# EAGLE board AllBoards1 (EAGLE 8.1.0), part 1 of 3
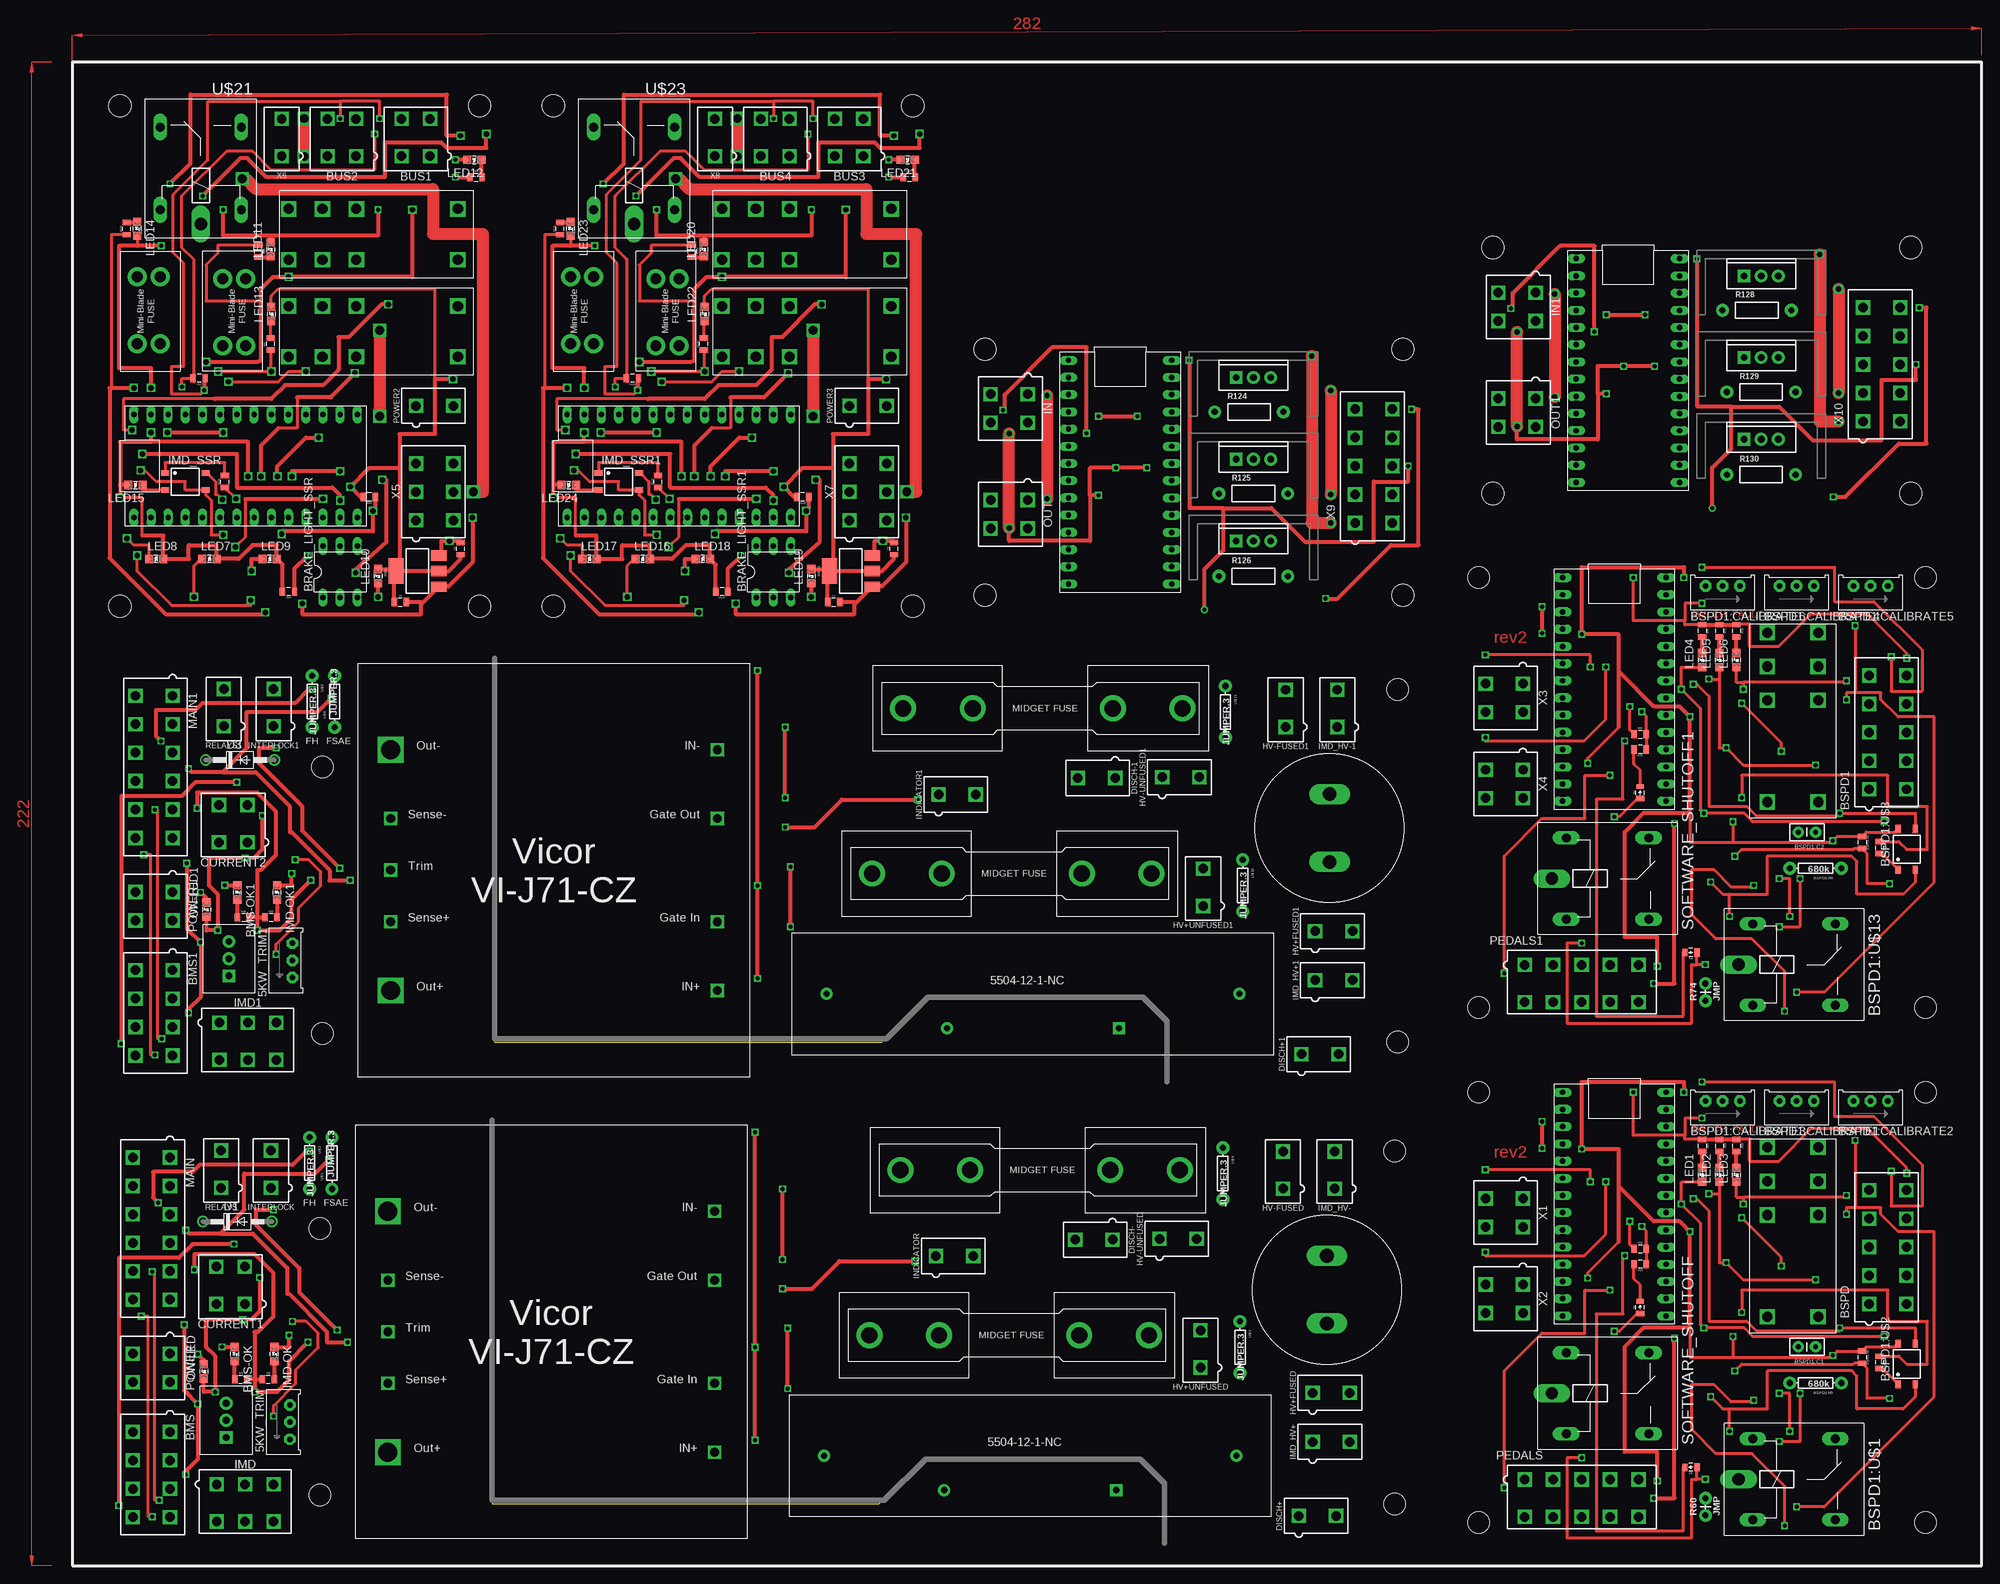
[diagram p0: board, top side]
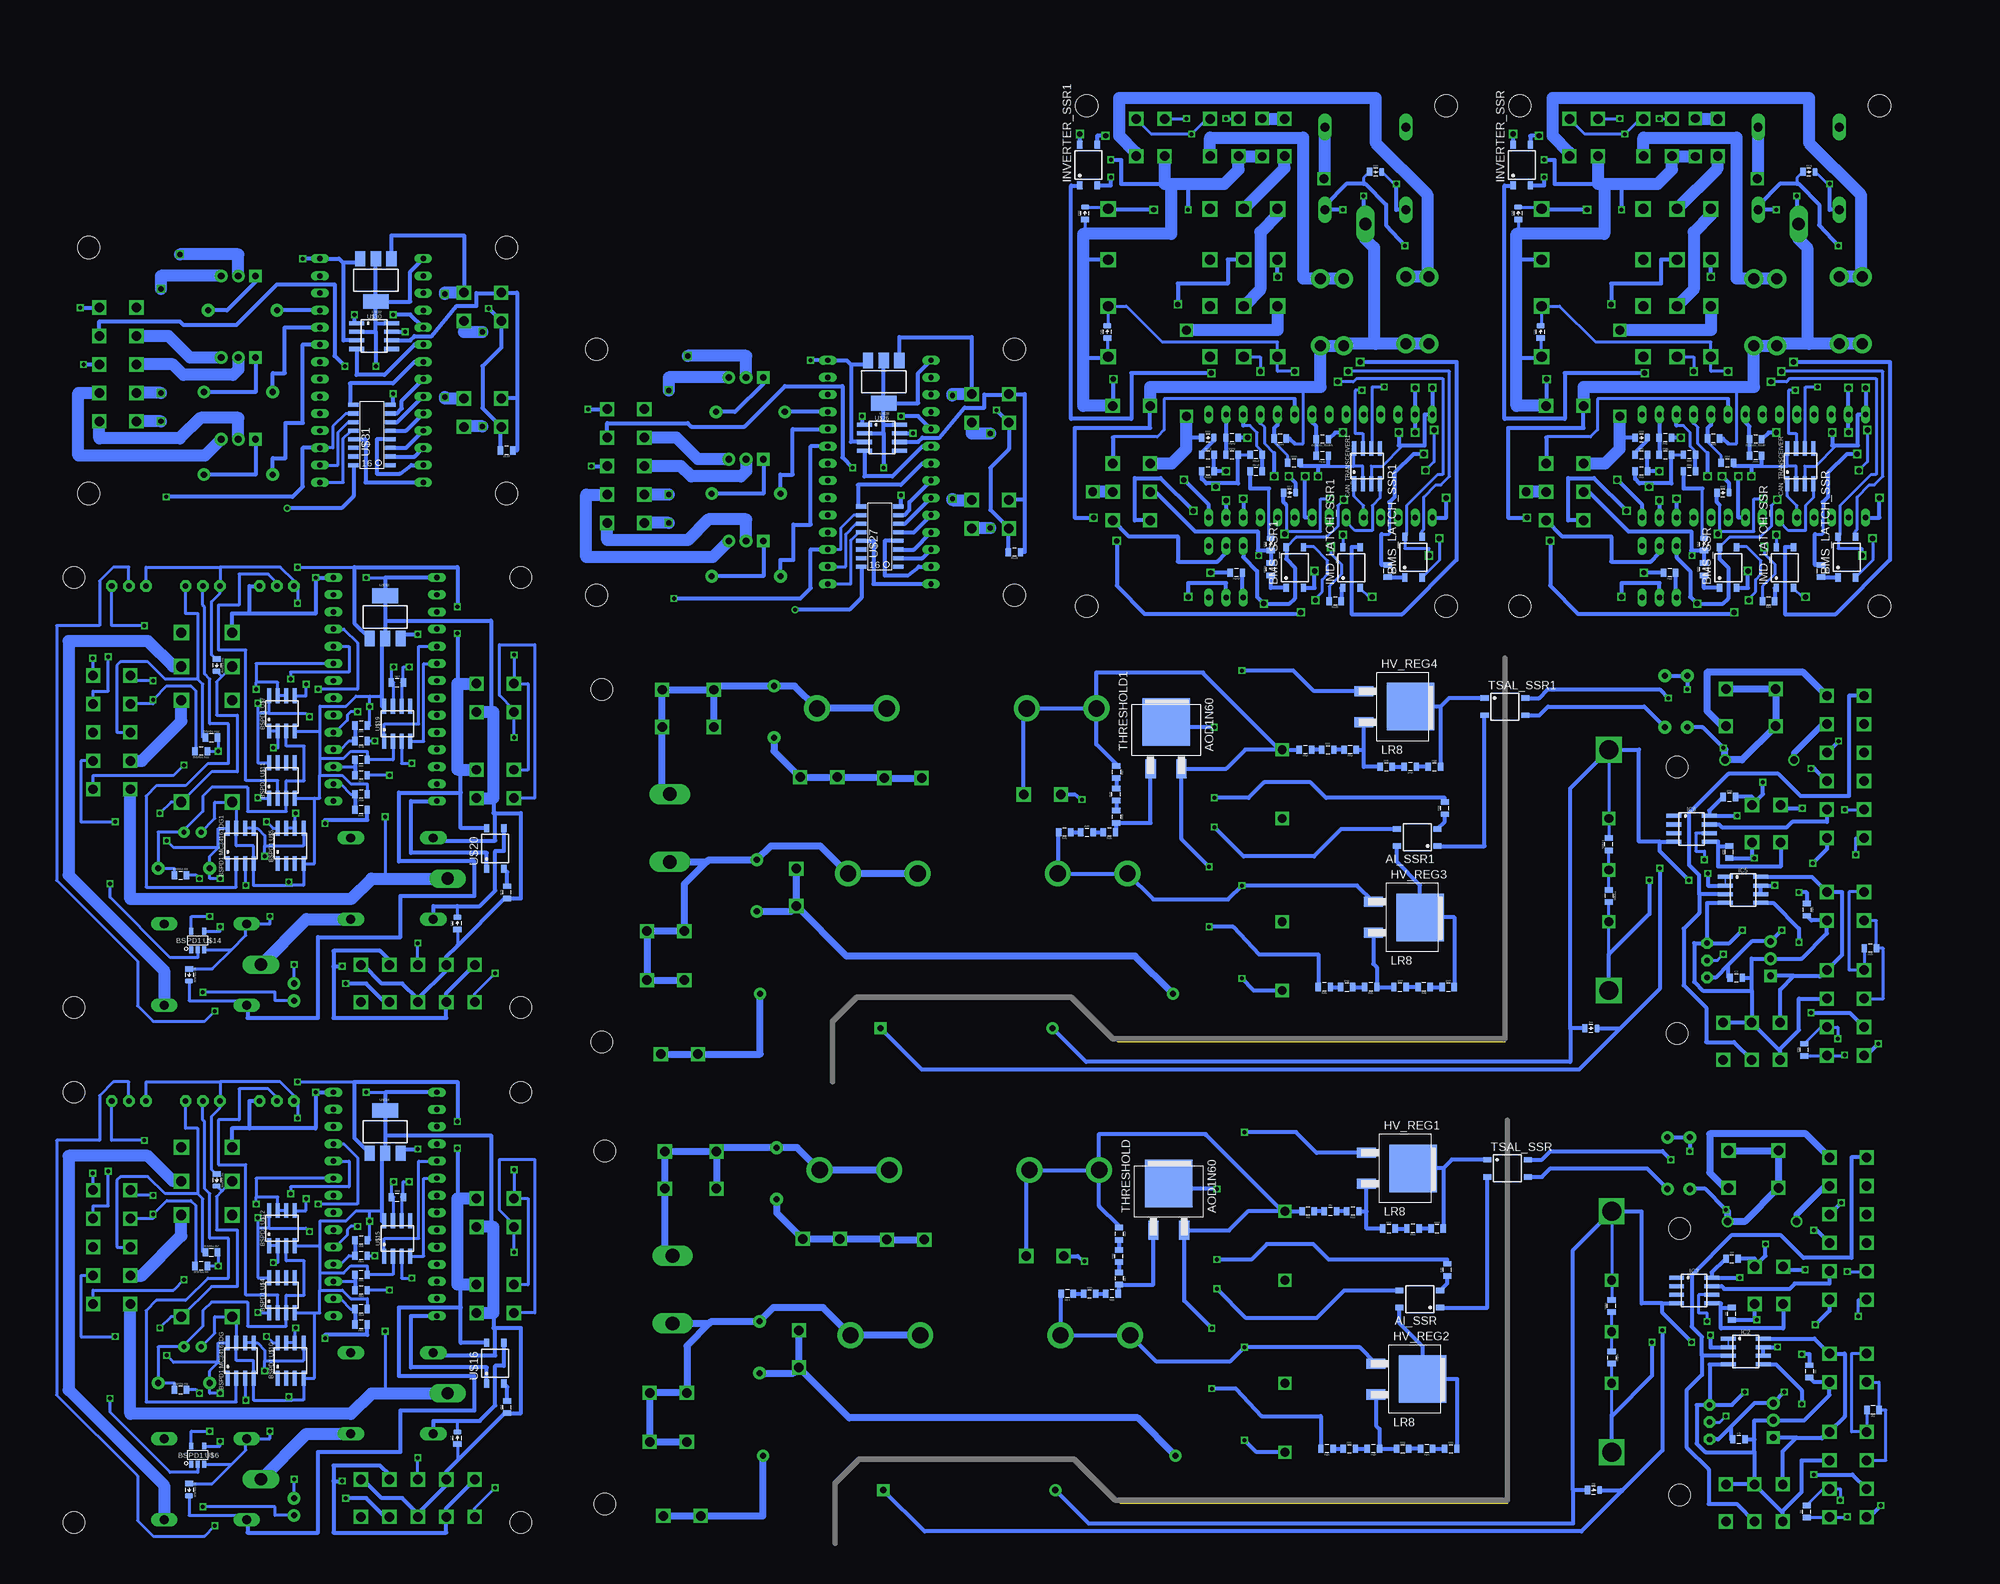
[diagram p1: board, bottom side, seen from below]

No outline drawn. Coordinates in mm, seen from the top.
Copper layers (1*16): Top 0.035mm / dielectric 1.5mm / Bottom 0.035mm
Design rules "default": minimum track width 10mil, minimum drill 24mil, track to track 8mil, track to pad 8mil, pad to pad 8mil, via to via 8mil, smd to smd 8mil, copper to edge 40mil, drill to drill 8mil, minimum pad ring 10mil, minimum via ring 8mil, stop-mask expansion 4mil, vias tented up to drill 0mil, thermal gap 10mil
Holes 3.2 mm at 36.58,49.78 36.58,10.41 195.33,9.14 195.33,61.21 36.97,117.95 36.97,78.58 195.72,77.31 195.72,129.38 207.68,69.91 273.72,69.91 273.72,6.41 207.68,6.41 207.68,145.91 273.72,145.91 273.72,82.41 207.68,82.41
Holes 3.3 mm at 7.05,215.58 60.13,215.58 7.05,141.67 60.13,141.67 71.05,215.58 124.13,215.58 71.05,141.67 124.13,141.67 196.53,179.64 134.81,179.64 196.53,143.32 134.81,143.32 271.53,194.64 209.81,194.64 271.53,158.32 209.81,158.32

## Footprints (pad centres in the part's own frame; a part is rotated, then mirrored left to right if it is on the bottom)
TRIMPOT_3296 = drill 0.813 pad 1.676 octagon: 1 2.54,1.27; 2 0,1.27; 3 -2.54,1.27
SOP04 = smd 0.8 x 1.2: 1 -1.27,-3; 2 1.27,-3; 3 1.27,3; 4 -1.27,3
MINIFIT_5566-8 = drill 1.4 square: 1 6.3,-2.75; 2 2.1,-2.75; 3 -2.1,-2.75; 4 -6.3,-2.75; 5 6.3,2.75; 6 2.1,2.75; 7 -2.1,2.75; 8 -6.3,2.75
LED-805 = smd 1.2 x 1.2: A 0,-1.05; C 0,1.05
0805 = smd 0.8 x 1.2: 1 -0.9,0; 2 0.9,0
DIL06 = drill 0.813 long: 1 -2.54,-3.81; 2 0,-3.81; 3 2.54,-3.81; 4 2.54,3.81; 5 0,3.81; 6 -2.54,3.81
MINIFIT_5566-10 = drill 1.4 square: 1 8.4,-2.75; 2 4.2,-2.75; 3 0,-2.75; 4 -4.2,-2.75; 5 -8.4,-2.75; 6 8.4,2.75; 7 4.2,2.75; 8 0,2.75; 9 -4.2,2.75; 10 -8.4,2.75
CAP-PTH-SMALLEZ = drill 0.7 pad 1.651: 1 0,0; 2 2.54,0
0805_D = smd 0.8 x 1.2: A -0.9,0; C 0.9,0
SOIC-08 = smd 0.6 x 2.2: 1 -1.905,-2.6; 2 -0.635,-2.6; 3 0.635,-2.6; 4 1.905,-2.6; 5 1.905,2.6; 6 0.635,2.6; 7 -0.635,2.6; 8 -1.905,2.6
AXIAL-0.3EZ = drill 0.9 pad 1.88: P$1 -3.81,0; P$2 3.81,0
ZF112 = drill 1.321 long: 1 4.064,14.884; 2 4.064,2.896; O 16.256,14.884; S 16.256,2.896 | drill 1.803 long: P 1.956,8.89
JW2SN = drill 1.5 square: 2 10.008,0; 3 5.004,0; 4 0,0; 5 0,7.493; 6 5.004,7.493; 7 10.008,7.493; COIL+ 25.019,0; COIL- 25.019,7.493
SOT-23-5 = smd 1 x 0.55: 1 -1.35,0.95; 2 -1.35,0; 3 -1.35,-0.95; 4 1.35,-0.95; 5 1.35,0.95
MINIFIT_5566-4 = drill 1.4 square: 1 2.1,-2.75; 2 -2.1,-2.75; 3 2.1,2.75; 4 -2.1,2.75
LLS2V221MELZ = drill 2 long: P$1 -5,0; P$2 5,0
DO-41 = drill 1.118: A 5.08,0; C -5.08,0
MINIFIT_5566-2 = drill 1.4 square: 1 0,-2.75; 2 0,2.75
1A3400_38.1MM = drill 2.413 pad 3.81: N3 30.988,0; N4 41.275,0; P1 0,0; P2 10.287,0
MINI-BLADE_FUSE_HOLDER = drill 1.613 pad 2.794: L1 0,3.404; L2 0,0; R1 9.906,3.404; R2 9.906,0
TO-252 = smd 1.499 x 2.794: 1 -2.286,0; 3 2.286,0 | smd 7.01 x 7.01: 2(TAB) 0,6.909
TO-220 = drill 1 pad 1.88 square: 1 -2.54,0 | drill 1 pad 1.88: 2 0,0; 3 2.54,0
MINIFIT_5566-6 = drill 1.4 square: 1 4.2,-2.75; 2 0,-2.75; 3 -4.2,-2.75; 4 4.2,2.75; 5 0,2.75; 6 -4.2,2.75
G2RL-2 = drill 1.5 square: 2 10.008,0; 3 5.004,0; 4 0,0; 5 0,7.493; 6 5.004,7.493; 7 10.008,7.493; COIL+ 25.019,0; COIL- 25.019,7.493
MINIFIT_5566-12 = drill 1.4 square: 1 10.5,-2.75; 2 6.3,-2.75; 3 2.1,-2.75; 4 -2.1,-2.75; 5 -6.3,-2.75; 6 -10.5,-2.75; 7 10.5,2.75; 8 6.3,2.75; 9 2.1,2.75; 10 -2.1,2.75; 11 -6.3,2.75; 12 -10.5,2.75
AXIAL-0.1 = drill 0.9 pad 1.88: P$1 0,0; P$2 2.54,0
AXIAL-0.4 = drill 0.9 pad 1.88: P$1 -5.08,0; P$2 5.08,0
SOT223 = smd 1.5 x 2.235: 1 -2.3,-3.15; 2 0,-3.15; 3 2.3,-3.15 | smd 3.8 x 2.2: 4 0,3.15
TO-220-SINK = drill 1 pad 1.88 square: 1 -2.54,0 | drill 1 pad 1.88: 2 0,0; 3 2.54,0
AXIAL-0.3 = drill 0.9 pad 1.88: P$1 -3.81,0; P$2 3.81,0
HV_DCDC_VI-J71-CZ = drill 1.3 square: 1VIN+ 5.08,-12.7; 2GATEIN 5.08,-22.86; 3GATEOUT 5.08,-38.1; 4VIN- 5.08,-48.26; 6SENSE+ 53.34,-22.86; 7TRIM 53.34,-30.48; 8SENSE- 53.34,-38.1 | drill 2.8 square: 5VOUT+ 53.34,-12.7; 9VOUT- 53.34,-48.26
5504-12-1-NC = drill 0.9 pad 1.778 square: COIL+ 48.26,-14.097 | drill 0.9 pad 1.778: COIL- 22.86,-14.097; CONTACT1 5.08,-9.017; CONTACT2 66.04,-9.017
TEENSY_3.2_SIMPLE = drill 0.8 long: 3.3V 16.51,29.21; A0 16.51,3.81; A1 16.51,6.35; A2 16.51,8.89; A3 16.51,11.43; A4 16.51,13.97; A5 16.51,16.51; A6 16.51,19.05; A7 16.51,21.59; A8 16.51,24.13; A9 16.51,26.67; AGND 16.51,31.75; D0(RX1) 1.27,31.75; D1(TX1) 1.27,29.21; D2 1.27,26.67; D3(CANTX) 1.27,24.13; D4(CANRX) 1.27,21.59; D5 1.27,19.05; D6 1.27,16.51; D7(RX3) 1.27,13.97; D8(TX3) 1.27,11.43; D9(RX2) 1.27,8.89; D10(TX2) 1.27,6.35; D11 1.27,3.81; D12 1.27,1.27; D13 16.51,1.27; GND 1.27,34.29; VIN 16.51,34.29
SOIC-16 = smd 0.61 x 1.524: 1 -4.445,-2.794; 2 -3.175,-2.794; 3 -1.905,-2.794; 4 -0.635,-2.794; 5 0.635,-2.794; 6 1.905,-2.794; 7 3.175,-2.794; 8 4.445,-2.794; 9 4.445,2.667; 10 3.175,2.667; 11 1.905,2.667; 12 0.635,2.667; 13 -0.635,2.667; 14 -1.905,2.667; 15 -3.175,2.667; 16 -4.445,2.667

## Placement (x,y rotation side)
5KW_TRIM  [TRIMPOT_3296]  30.86,21.21 270 top
5KW_TRIM1  [TRIMPOT_3296]  31.25,89.38 270 top
AI_SSR  CPC1002N  [SOP04]  74.93,39.37 90 bottom
AI_SSR1  CPC1002N  [SOP04]  75.32,107.54 90 bottom
BMS  [MINIFIT_5566-8]  11.68,13.46 90 top
BMS1  [MINIFIT_5566-8]  12.07,81.63 90 top
BMS-OK  [LED-805]  24,31.24 180 top
BMS-OK1  [LED-805]  24.39,99.41 180 top
BMS_LATCH_SSR  CPC1002N  [SOP04]  11.87,148.91 0 bottom
BMS_LATCH_SSR1  CPC1002N  [SOP04]  75.87,148.91 0 bottom
BMS_SSR  CPC1002N  [SOP04]  29.4,147.38 0 bottom
BMS_SSR1  CPC1002N  [SOP04]  93.4,147.38 0 bottom
BOARD_TEMP  THERMISTOR_NCP21  [0805]  25.34,166.31 180 bottom
BOARD_TEMP1  THERMISTOR_NCP21  [0805]  89.34,166.31 180 bottom
BRAKE_LIGHT_SSR  SOLID_STATE_RELAY_VO14642AT  [DIL06]  39.56,146.75 0 top
BRAKE_LIGHT_SSR1  SOLID_STATE_RELAY_VO14642AT  [DIL06]  103.56,146.75 0 top
BSPD  MINIFIT_5566-10  [MINIFIT_5566-10]  268.13,47.05 270 top
BSPD1  MINIFIT_5566-10  [MINIFIT_5566-10]  268.13,123.05 270 top
BSPD1:C1  .47u  [CAP-PTH-SMALLEZ]  257.46,32.32 180 top
BSPD1:C2  .47u  [CAP-PTH-SMALLEZ]  257.46,108.32 180 top
BSPD1:CALIBRATE1  [TRIMPOT_3296]  254.67,67.37 0 top
BSPD1:CALIBRATE2  [TRIMPOT_3296]  265.59,67.37 0 top
BSPD1:CALIBRATE3  [TRIMPOT_3296]  243.75,67.37 0 top
BSPD1:CALIBRATE4  [TRIMPOT_3296]  254.67,143.37 0 top
BSPD1:CALIBRATE5  [TRIMPOT_3296]  265.59,143.37 0 top
BSPD1:CALIBRATE6  [TRIMPOT_3296]  243.75,143.37 0 top
BSPD1:D1  DIODE0805  [0805_D]  252.64,56.96 270 bottom
BSPD1:D2  DIODE0805  [0805_D]  256.7,11.24 270 bottom
BSPD1:D3  DIODE0805  [0805_D]  252.64,132.96 270 bottom
BSPD1:D4  DIODE0805  [0805_D]  256.7,87.24 270 bottom
BSPD1:MC34161DG  [SOIC-08]  249.08,30.29 0 bottom
BSPD1:MC34161DG1  [SOIC-08]  249.08,106.29 0 bottom
BSPD1:R1  10k  [0805]  264.32,30.79 270 top
BSPD1:R2  10k  [0805]  264.32,106.79 270 top
BSPD1:R3  330  [0805]  257.97,25.97 0 bottom
BSPD1:R4  10k  [0805]  254.92,44.26 180 bottom
BSPD1:R5  680k  [AXIAL-0.3EZ]  257.46,26.98 180 top
BSPD1:R6  680  [0805]  266.86,30.03 270 top
BSPD1:R7  10k  [0805]  253.4,46.29 0 bottom
BSPD1:R8  330  [0805]  257.97,101.97 0 bottom
BSPD1:R9  680k  [AXIAL-0.3EZ]  257.46,102.98 180 top
BSPD1:R10  680  [0805]  266.86,106.03 270 top
BSPD1:R11  10k  [0805]  254.92,120.26 180 bottom
BSPD1:R12  10k  [0805]  253.4,122.29 0 bottom
BSPD1:U$1  G5LE  [ZF112]  244.13,3.87 0 top
BSPD1:U$2  CPC1002N  [SOP04]  270.92,29.78 0 top
BSPD1:U$3  JW2SN-DC5V  [JW2SN]  250.35,61.78 270 top
BSPD1:U$4  MCP6002SOIC  [SOIC-08]  242.98,39.94 0 bottom
BSPD1:U$5  MCP6002SOIC  [SOIC-08]  241.71,106.29 0 bottom
BSPD1:U$6  SN74LVC1G07  [SOT-23-5]  255.43,16.32 90 bottom
BSPD1:U$7  MCP6002SOIC  [SOIC-08]  242.98,125.84 0 bottom
BSPD1:U$8  CPC1002N  [SOP04]  270.92,105.78 0 top
BSPD1:U$9  JW2SN-DC5V  [JW2SN]  250.35,137.78 270 top
BSPD1:U$10  MCP6002SOIC  [SOIC-08]  241.71,30.29 0 bottom
BSPD1:U$11  MCP6002SOIC  [SOIC-08]  242.98,115.94 0 bottom
BSPD1:U$12  MCP6002SOIC  [SOIC-08]  242.98,49.84 0 bottom
BSPD1:U$13  G5LE  [ZF112]  244.13,79.87 0 top
BSPD1:U$14  SN74LVC1G07  [SOT-23-5]  255.43,92.32 90 bottom
BUS1  MINIFIT_5566-4  [MINIFIT_5566-4]  50.74,210.88 0 top
BUS2  MINIFIT_5566-4  [MINIFIT_5566-4]  39.81,210.88 0 top
BUS3  MINIFIT_5566-4  [MINIFIT_5566-4]  114.74,210.88 0 top
BUS4  MINIFIT_5566-4  [MINIFIT_5566-4]  103.81,210.88 0 top
C1  220uF  [LLS2V221MELZ]  185.29,40.77 90 top
C2  1uF  [0805]  28.2,86.84 0 bottom
C3  1uF  [0805]  27.81,18.67 0 bottom
C4  220uF  [LLS2V221MELZ]  185.68,108.94 90 top
C5  .22uF  [0805]  48.45,142.3 0 top
C6  .1uF  [0805]  57.34,150.18 90 top
C7  .22uF  [0805]  112.45,142.3 0 top
C8  .1uF  [0805]  121.34,150.18 90 top
CAN_TRANSCEIVER  MCP2551  [SOIC-08]  18.73,162.37 0 bottom
CAN_TRANSCEIVER1  MCP2551  [SOIC-08]  82.73,162.37 0 bottom
CURRENT1  [MINIFIT_5566-4]  23.37,41.4 0 top
CURRENT2  [MINIFIT_5566-4]  23.76,109.57 0 top
D1  DIODE  [DO-41]  24.38,50.8 0 top
D2  DIODE0805  [0805_D]  49.28,11.18 0 bottom
D3  DIODE  [DO-41]  24.77,118.97 0 top
D4  DIODE0805  [0805_D]  49.67,79.35 0 bottom
D5  DIODE0805  [0805_D]  239.05,14.54 180 top
D6  DIODE0805  [0805_D]  231.55,38.16 90 top
D7  DIODE0805  [0805_D]  217.08,18.86 90 bottom
D8  DIODE0805  [0805_D]  239.05,90.54 180 top
D9  DIODE0805  [0805_D]  231.55,114.16 90 top
D10  DIODE0805  [0805_D]  217.08,94.86 90 bottom
D11  DIODE0805  [0805_D]  30.16,158.43 0 bottom
D12  DIODE0805  [0805_D]  32.96,150.81 90 bottom
D13  DIODE0805  [0805_D]  42.23,166.56 0 bottom
D14  DIODE0805  [0805_D]  17.46,205.8 0 bottom
D15  DIODE0805  [0805_D]  57.09,182.18 90 bottom
D16  DIODE0805  [0805_D]  60.39,199.71 90 bottom
D17  DIODE0805  [0805_D]  94.16,158.43 0 bottom
D18  DIODE0805  [0805_D]  96.96,150.81 90 bottom
D19  DIODE0805  [0805_D]  106.23,166.56 0 bottom
D20  DIODE0805  [0805_D]  81.46,205.8 0 bottom
D21  DIODE0805  [0805_D]  121.09,182.18 90 bottom
D22  DIODE0805  [0805_D]  124.39,199.71 90 bottom
DISCH+  TO DISCHARGE +  [MINIFIT_5566-2]  183.9,7.37 270 top
DISCH+1  TO DISCHARGE +  [MINIFIT_5566-2]  184.29,75.54 270 top
DISCH-  TO DISCHARGE -  [MINIFIT_5566-2]  150.88,48.13 90 top
DISCH-1  TO DISCHARGE -  [MINIFIT_5566-2]  151.27,116.3 90 top
FUSE  250mA  [1A3400_38.1MM]  159,34.04 180 top
FUSE1  250mA  [1A3400_38.1MM]  163.58,58.42 180 top
FUSE2  250mA  [1A3400_38.1MM]  159.39,102.21 180 top
FUSE3  250mA  [1A3400_38.1MM]  163.97,126.59 180 top
FUSE_BUS_1  5A  [MINI-BLADE_FUSE_HOLDER]  9.59,190.31 270 top
FUSE_BUS_2  5A  [MINI-BLADE_FUSE_HOLDER]  25.59,180.15 90 top
FUSE_BUS_3  5A  [MINI-BLADE_FUSE_HOLDER]  73.59,190.31 270 top
FUSE_BUS_4  5A  [MINI-BLADE_FUSE_HOLDER]  89.59,180.15 90 top
HV+FUSED  [MINIFIT_5566-2]  185.93,25.53 270 top
HV+FUSED1  [MINIFIT_5566-2]  186.32,93.7 270 top
HV+UNFUSED  CONNECTOR FSAE  [MINIFIT_5566-2]  166.62,32 0 top
HV+UNFUSED1  CONNECTOR FSAE  [MINIFIT_5566-2]  167.01,100.17 0 top
HV-FUSED  [MINIFIT_5566-2]  178.82,58.42 0 top
HV-FUSED1  [MINIFIT_5566-2]  179.21,126.59 0 top
HV-UNFUSED  CONNECTOR FSAE  [MINIFIT_5566-2]  163.32,48.26 270 top
HV-UNFUSED1  CONNECTOR FSAE  [MINIFIT_5566-2]  163.71,116.43 270 top
HV_REG1  LR8  [TO-252]  82.8,58.67 270 bottom
HV_REG2  LR8  [TO-252]  81.41,27.56 270 bottom
HV_REG3  LR8  [TO-252]  81.8,95.73 270 bottom
HV_REG4  LR8  [TO-252]  83.19,126.84 270 bottom
IC1  [TO-220]  22.73,21.46 90 top
IC2  MCP6002SOIC  [SOIC-08]  26.8,31.62 270 bottom
IC3  MCP6002SOIC  [SOIC-08]  34.42,40.64 270 bottom
IC4  [TO-220]  23.12,89.63 90 top
IC5  MCP6002SOIC  [SOIC-08]  27.19,99.79 270 bottom
IC6  MCP6002SOIC  [SOIC-08]  34.81,108.81 270 bottom
IMD  [MINIFIT_5566-6]  25.53,9.27 180 top
IMD1  [MINIFIT_5566-6]  25.92,77.44 180 top
IMD-OK  [LED-805]  29.84,31.24 180 top
IMD-OK1  [LED-805]  30.23,99.41 180 top
IMD_HV+  [MINIFIT_5566-2]  185.93,18.29 270 top
IMD_HV+1  [MINIFIT_5566-2]  186.32,86.46 270 top
IMD_HV-  [MINIFIT_5566-2]  186.44,58.42 0 top
IMD_HV-1  [MINIFIT_5566-2]  186.83,126.59 0 top
IMD_LATCH_SSR  CPC1002N  [SOP04]  21.02,147.38 0 bottom
IMD_LATCH_SSR1  CPC1002N  [SOP04]  85.02,147.38 0 bottom
IMD_SHUTDOWN  G2RL-2-DC12  [G2RL-2]  31.94,192.85 0 top
IMD_SHUTDOWN1  G2RL-2-DC12  [G2RL-2]  31.94,178.5 0 top
IMD_SHUTDOWN2  G2RL-2-DC12  [G2RL-2]  95.94,192.85 0 top
IMD_SHUTDOWN3  G2RL-2-DC12  [G2RL-2]  95.94,178.5 0 top
IMD_SSR  CPC1002N  [SOP04]  16.7,160.08 270 top
IMD_SSR1  CPC1002N  [SOP04]  80.7,160.08 270 top
IN  MINIFIT_5566-4  [MINIFIT_5566-4]  138.37,170.88 90 top
IN1  MINIFIT_5566-4  [MINIFIT_5566-4]  213.37,185.88 90 top
INDICATOR  [MINIFIT_5566-2]  130.3,45.72 270 top
INDICATOR1  [MINIFIT_5566-2]  130.69,113.89 270 top
INTERLOCK  [MINIFIT_5566-2]  29.34,58.55 0 top
INTERLOCK1  [MINIFIT_5566-2]  29.73,126.72 0 top
INVERTER_SSR  CPC1002N  [SOP04]  59.88,206.82 0 bottom
INVERTER_SSR1  CPC1002N  [SOP04]  123.88,206.82 0 bottom
LED1  [LED-805]  240.7,57.72 0 top
LED2  [LED-805]  243.24,57.72 0 top
LED3  [LED-805]  245.78,57.72 0 top
LED4  [LED-805]  240.7,133.72 0 top
LED5  [LED-805]  243.24,133.72 0 top
LED6  [LED-805]  245.78,133.72 0 top
LED7  [LED-805]  20.26,148.65 270 top
LED8  [LED-805]  12.38,148.65 270 top
LED9  [LED-805]  29.15,148.65 270 top
LED10  [LED-805]  45.15,146.11 0 top
LED11  [LED-805]  29.27,194.37 0 top
LED12  [LED-805]  59.37,207.58 90 top
LED13  [LED-805]  29.4,184.85 0 top
LED14  [LED-805]  9.59,197.42 180 top
LED15  [LED-805]  9.33,159.57 90 top
LED16  [LED-805]  84.26,148.65 270 top
LED17  [LED-805]  76.38,148.65 270 top
LED18  [LED-805]  93.15,148.65 270 top
LED19  [LED-805]  109.15,146.11 0 top
LED20  [LED-805]  93.27,194.37 0 top
LED21  [LED-805]  123.37,207.58 90 top
LED22  [LED-805]  93.4,184.85 0 top
LED23  [LED-805]  73.59,197.42 180 top
LED24  [LED-805]  73.33,159.57 90 top
MAIN  [MINIFIT_5566-12]  11.68,49.78 90 top
MAIN1  [MINIFIT_5566-12]  12.07,117.95 90 top
ON-LED  [LED-805]  19.43,28.7 0 top
ON-LED1  [LED-805]  19.82,96.87 0 top
OUT  MINIFIT_5566-4  [MINIFIT_5566-4]  138.37,155.26 90 top
OUT1  MINIFIT_5566-4  [MINIFIT_5566-4]  213.37,170.26 90 top
PEDALS  MINIFIT_5566-10  [MINIFIT_5566-10]  222.92,9.97 180 top
PEDALS1  MINIFIT_5566-10  [MINIFIT_5566-10]  222.92,85.97 180 top
POWER  [MINIFIT_5566-4]  11.68,29.21 90 top
POWER1  [MINIFIT_5566-4]  12.07,97.38 90 top
POWER2  MINIFIT_5566-2  [MINIFIT_5566-2]  53.53,171.26 270 top
POWER3  MINIFIT_5566-2  [MINIFIT_5566-2]  117.53,171.26 270 top
R1  120  [0805]  17.78,8 90 bottom
R2  120  [0805]  8,22.99 180 bottom
R3  [0805]  28.96,27.56 0 top
R4  [0805]  24.89,27.56 0 top
R5  100  [0805]  17.4,28.7 270 bottom
R6  10k  [0805]  28.83,37.21 90 bottom
R7  10k  [0805]  28.83,45.34 0 bottom
R8  8.2k  [0805]  91.44,52.32 180 bottom
R9  8.2k  [0805]  88.14,52.32 0 bottom
R10  8.2k  [0805]  84.84,52.32 180 bottom
R11  2k  [0805]  79.5,49.78 0 bottom
R12  2k  [0805]  75.95,49.78 180 bottom
R13  2k  [0805]  72.39,49.78 0 bottom
R14  500k  [0805]  127,40.13 180 bottom
R15  500k  [0805]  123.7,40.13 0 bottom
R16  500k  [0805]  120.4,40.13 180 bottom
R17  40k  [0805]  119.38,42.42 270 bottom
R18  40k  [0805]  119.38,45.72 90 bottom
R19  40k  [0805]  119.38,49.02 270 bottom
R20  20k  [0805]  88.65,17.27 180 bottom
R21  20k  [0805]  85.34,17.27 0 bottom
R22  20k  [0805]  81.79,17.27 180 bottom
R23  2k  [0805]  77.47,17.27 0 bottom
R24  2k  [0805]  73.91,17.27 180 bottom
R25  2k  [0805]  70.36,17.27 0 bottom
R26  1k  [0805]  70.87,43.69 90 bottom
R27  2k  [0805]  77.86,85.44 0 bottom
R28  10k  [0805]  29.22,113.51 0 bottom
R29  [0805]  29.35,95.73 0 top
R30  [0805]  25.28,95.73 0 top
R31  20k  [0805]  82.18,85.44 180 bottom
R32  10k  [0805]  29.22,105.38 90 bottom
R33  120  [0805]  18.17,76.17 90 bottom
R34  100  [0805]  17.79,96.87 270 bottom
R35  120  [0805]  8.39,91.16 180 bottom
R36  500k  [0805]  120.79,108.3 180 bottom
R37  40k  [0805]  119.77,117.19 270 bottom
R38  1k  [0805]  71.26,111.86 90 bottom
R39  2k  [0805]  72.78,117.95 0 bottom
R40  500k  [0805]  124.09,108.3 0 bottom
R41  500k  [0805]  127.39,108.3 180 bottom
R42  40k  [0805]  119.77,113.89 90 bottom
R43  40k  [0805]  119.77,110.59 270 bottom
R44  2k  [0805]  76.34,117.95 180 bottom
R45  2k  [0805]  79.89,117.95 0 bottom
R46  2k  [0805]  74.3,85.44 180 bottom
R47  2k  [0805]  70.75,85.44 0 bottom
R48  20k  [0805]  85.73,85.44 0 bottom
R49  20k  [0805]  89.04,85.44 180 bottom
R50  8.2k  [0805]  85.23,120.49 180 bottom
R51  8.2k  [0805]  88.53,120.49 0 bottom
R52  8.2k  [0805]  91.83,120.49 180 bottom
R53  120  [0805]  225.97,54.42 0 bottom
R54  15k  [0805]  231.3,37.91 180 bottom
R55  15k  [0805]  231.3,42.99 180 bottom
R56  15k  [0805]  231.3,48.07 180 bottom
R57  150  [0805]  240.7,62.04 270 top
R58  150  [0805]  243.24,62.04 270 top
R59  150  [0805]  245.78,62.04 270 top
R60  JMP  [AXIAL-0.1]  241.21,7.43 90 top
R61  100  [0805]  209.71,23.43 90 bottom
R62  10k  [0805]  231.3,35.62 180 bottom
R63  10k  [0805]  231.3,40.7 180 bottom
R64  10k  [0805]  231.3,45.78 180 bottom
R65  43k  [0805]  231.55,44.51 180 top
R66  12k  [0805]  231.55,46.8 0 top
R67  120  [0805]  225.97,130.42 0 bottom
R68  15k  [0805]  231.3,113.91 180 bottom
R69  15k  [0805]  231.3,118.99 180 bottom
R70  15k  [0805]  231.3,124.07 180 bottom
R71  150  [0805]  240.7,138.04 270 top
R72  150  [0805]  243.24,138.04 270 top
R73  150  [0805]  245.78,138.04 270 top
R74  JMP  [AXIAL-0.1]  241.21,83.43 90 top
R75  100  [0805]  209.71,99.43 90 bottom
R76  10k  [0805]  231.3,111.62 180 bottom
R77  10k  [0805]  231.3,116.7 180 bottom
R78  10k  [0805]  231.3,121.78 180 bottom
R79  43k  [0805]  231.55,120.51 180 top
R80  12k  [0805]  231.55,122.8 0 top
R81  43k  [0805]  38.67,166.56 180 bottom
R82  100  [0805]  38.04,146.62 180 bottom
R83  100  [0805]  32.96,147.13 90 bottom
R84  100  [0805]  23.43,142.43 180 bottom
R85  100  [0805]  15.68,146.87 270 bottom
R86  820  [0805]  27.5,194.12 270 top
R87  120  [0805]  18.73,175.32 180 top
R88  12k  [0805]  38.67,164.02 0 bottom
R89  43k  [0805]  35.12,161.61 0 bottom
R90  12k  [0805]  35.12,164.02 180 bottom
R91  43k  [0805]  42.23,164.02 0 bottom
R92  12k  [0805]  42.23,161.61 180 bottom
R93  43k  [0805]  31.56,166.43 180 bottom
R94  12k  [0805]  29.53,162.88 0 bottom
R95  10k  [0805]  25.34,163.89 180 bottom
R96  100  [0805]  59.63,205.04 0 top
R97  820  [0805]  29.27,180.4 90 top
R98  10k  [0805]  31.94,143.83 180 top
R99  2.2k  [0805]  43.88,157.8 180 top
R100  270  [0805]  8.06,197.42 90 top
R101  680  [0805]  22.54,160.08 90 top
R102  43k  [0805]  102.67,166.56 180 bottom
R103  100  [0805]  102.04,146.62 180 bottom
R104  100  [0805]  96.96,147.13 90 bottom
R105  100  [0805]  87.43,142.43 180 bottom
R106  100  [0805]  79.68,146.87 270 bottom
R107  820  [0805]  91.5,194.12 270 top
R108  120  [0805]  82.73,175.32 180 top
R109  12k  [0805]  102.67,164.02 0 bottom
R110  43k  [0805]  99.11,161.61 0 bottom
R111  12k  [0805]  99.11,164.02 180 bottom
R112  43k  [0805]  106.23,164.02 0 bottom
R113  12k  [0805]  106.23,161.61 180 bottom
R114  43k  [0805]  95.56,166.43 180 bottom
R115  12k  [0805]  93.53,162.88 0 bottom
R116  10k  [0805]  89.34,163.89 180 bottom
R117  100  [0805]  123.63,205.04 0 top
R118  820  [0805]  93.27,180.4 90 top
R119  10k  [0805]  95.94,143.83 180 top
R120  2.2k  [0805]  107.88,157.8 180 top
R121  270  [0805]  72.06,197.42 90 top
R122  680  [0805]  86.54,160.08 90 top
R123  120  [0805]  134.81,149.67 180 bottom
R124  [AXIAL-0.4]  173.8,170.37 0 top
R125  [AXIAL-0.4]  174.43,158.3 0 top
R126  [AXIAL-0.4]  174.43,146.11 0 top
R127  120  [0805]  209.81,164.67 180 bottom
R128  [AXIAL-0.4]  248.8,185.37 0 top
R129  [AXIAL-0.4]  249.43,173.3 0 top
R130  [AXIAL-0.4]  249.43,161.11 0 top
REG  5V  [SOT223]  50.99,146.87 90 top
REG1  5V  [SOT223]  114.99,146.87 90 top
RELAYS  [MINIFIT_5566-2]  21.97,58.55 0 top
RELAYS1  [MINIFIT_5566-2]  22.36,126.72 0 top
SOFTWARE_SHUTOFF  G5LE  [ZF112]  216.57,16.57 0 top
SOFTWARE_SHUTOFF1  G5LE  [ZF112]  216.57,92.57 0 top
T1  N-CHANNEL_MOSFETGENERIC  [TO-220-SINK]  174.43,175.45 0 top
T2  N-CHANNEL_MOSFETGENERIC  [TO-220-SINK]  174.43,163.38 0 top
T3  N-CHANNEL_MOSFETGENERIC  [TO-220-SINK]  174.43,151.32 0 top
T4  N-CHANNEL_MOSFETGENERIC  [TO-220-SINK]  249.43,190.45 0 top
T5  N-CHANNEL_MOSFETGENERIC  [TO-220-SINK]  249.43,178.38 0 top
T6  N-CHANNEL_MOSFETGENERIC  [TO-220-SINK]  249.43,166.32 0 top
THRESHOLD  AOD1N60  [TO-252]  112.01,49.53 0 bottom
THRESHOLD1  AOD1N60  [TO-252]  112.4,117.7 0 bottom
TRIM+  [0805]  46.61,30.73 270 bottom
TRIM+1  [0805]  47,98.9 270 bottom
TRIM-  [0805]  46.61,38.35 90 bottom
TRIM-1  [0805]  47,106.52 90 bottom
TSAL_SSR  CPC1002N  [SOP04]  61.98,58.67 270 bottom
TSAL_SSR1  CPC1002N  [SOP04]  62.37,126.84 270 bottom
U$1  JUMPER.3  [AXIAL-0.3]  38.35,59.44 90 top
U$2  JUMPER.3  [AXIAL-0.3]  35.05,59.44 270 top
U$3  JUMPER.3  [AXIAL-0.3]  172.47,32.26 270 top
U$4  JUMPER.3  [AXIAL-0.3]  169.93,57.91 270 top
U$5  HV_DCDC_VI-J71-CZ  [HV_DCDC_VI-J71-CZ]  99.95,4.06 180 top
U$6  5504-12-1-NC  [5504-12-1-NC]  106.31,93.44 0 top
U$7  HV_DCDC_VI-J71-CZ  [HV_DCDC_VI-J71-CZ]  100.34,72.23 180 top
U$8  JUMPER.3  [AXIAL-0.3]  38.74,127.61 90 top
U$9  JUMPER.3  [AXIAL-0.3]  35.44,127.61 270 top
U$10  JUMPER.3  [AXIAL-0.3]  172.86,100.43 270 top
U$11  JUMPER.3  [AXIAL-0.3]  170.32,126.08 270 top
U$12  5504-12-1-NC  [5504-12-1-NC]  105.92,25.27 0 top
U$13  TEENSY_3.2_SIMPLE  [TEENSY_3.2_SIMPLE]  218.85,35.62 0 top
U$14  [SOT223]  227.74,64.07 0 bottom
U$15  MCP2551  [SOIC-08]  225.97,48.32 0 bottom
U$16  CPC1002N  [SOP04]  211.49,29.91 0 bottom
U$17  TEENSY_3.2_SIMPLE  [TEENSY_3.2_SIMPLE]  218.85,111.62 0 top
U$18  [SOT223]  227.74,140.07 0 bottom
U$19  MCP2551  [SOIC-08]  225.97,124.32 0 bottom
U$20  CPC1002N  [SOP04]  211.49,105.91 0 bottom
U$21  G5LE  [ZF112]  27.88,196.15 90 top
U$22  TEENSY_3.2_SIMPLE  [TEENSY_3.2_SIMPLE]  43.37,153.48 90 top
U$23  G5LE  [ZF112]  91.88,196.15 90 top
U$24  TEENSY_3.2_SIMPLE  [TEENSY_3.2_SIMPLE]  107.37,153.48 90 top
U$25  TEENSY_3.2_SIMPLE  [TEENSY_3.2_SIMPLE]  145.86,143.7 0 top
U$26  MCP2551  [SOIC-08]  154.37,166.56 270 bottom
U$27  CD4040BSOIC  [SOIC-16]  154.75,151.95 90 bottom
U$28  [SOT223]  154.11,174.81 180 bottom
U$29  TEENSY_3.2_SIMPLE  [TEENSY_3.2_SIMPLE]  220.86,158.7 0 top
U$30  MCP2551  [SOIC-08]  229.37,181.56 270 bottom
U$31  CD4040BSOIC  [SOIC-16]  229.75,166.95 90 bottom
U$32  [SOT223]  229.11,189.81 180 bottom
X1  MINIFIT_5566-4  [MINIFIT_5566-4]  211.49,52.13 90 top
X2  MINIFIT_5566-4  [MINIFIT_5566-4]  211.49,39.43 90 top
X3  MINIFIT_5566-4  [MINIFIT_5566-4]  211.49,128.13 90 top
X4  MINIFIT_5566-4  [MINIFIT_5566-4]  211.49,115.43 90 top
X5  MINIFIT_5566-6  [MINIFIT_5566-6]  53.53,158.56 270 top
X6  MINIFIT_5566-2  [MINIFIT_5566-2]  30.92,210.88 0 top
X7  MINIFIT_5566-6  [MINIFIT_5566-6]  117.53,158.56 270 top
X8  MINIFIT_5566-2  [MINIFIT_5566-2]  94.92,210.88 0 top
X9  CONNECTOR-10  [MINIFIT_5566-10]  192.21,162.37 270 top
X10  CONNECTOR-10  [MINIFIT_5566-10]  267.21,177.37 270 top

## Library data of the parts
5KW_TRIM 5KW_TRIM1 AI_SSR AI_SSR1 BMS-OK BMS-OK1 BMS_LATCH_SSR BMS_LATCH_SSR1 BMS_SSR BMS_SSR1 BOARD_TEMP BOARD_TEMP1 BRAKE_LIGHT_SSR BRAKE_LIGHT_SSR1 BSPD1:C1 BSPD1:C2 BSPD1:CALIBRATE1-BSPD1:CALIBRATE6 BSPD1:D1-BSPD1:D4 BSPD1:MC34161DG BSPD1:MC34161DG1 BSPD1:R1-BSPD1:R12 BSPD1:U$1-BSPD1:U$14 C1-C8 CAN_TRANSCEIVER CAN_TRANSCEIVER1 D1-D22 FUSE FUSE1-FUSE3 FUSE_BUS_1-FUSE_BUS_4 HV_REG1-HV_REG4 IC1-IC6 IMD-OK IMD-OK1 IMD_LATCH_SSR IMD_LATCH_SSR1 IMD_SHUTDOWN IMD_SHUTDOWN1-IMD_SHUTDOWN3 IMD_SSR IMD_SSR1 INVERTER_SSR INVERTER_SSR1 LED1-LED24 ON-LED ON-LED1 R1-R130 REG REG1 SOFTWARE_SHUTOFF SOFTWARE_SHUTOFF1 THRESHOLD THRESHOLD1 TRIM+ TRIM+1 TRIM- TRIM-1 TSAL_SSR TSAL_SSR1 U$1-U$32 = HyTechDevices
BMS BMS1 BSPD BSPD1 BUS1-BUS4 CURRENT1 CURRENT2 IN IN1 MAIN MAIN1 OUT OUT1 PEDALS PEDALS1 POWER POWER1 X1-X4 X9 X10 = HyTechDevices; OC_FARNELL: unknown; OC_NEWARK: unknown
DISCH+ DISCH+1 DISCH- DISCH-1 HV+FUSED HV+FUSED1 HV+UNFUSED HV+UNFUSED1 HV-FUSED HV-FUSED1 HV-UNFUSED HV-UNFUSED1 IMD_HV+ IMD_HV+1 IMD_HV- IMD_HV-1 INDICATOR INDICATOR1 INTERLOCK INTERLOCK1 POWER2 POWER3 RELAYS RELAYS1 X6 X8 = HyTechDevices; OC_FARNELL: 1822072; OC_NEWARK: unknown
IMD IMD1 X5 X7 = HyTechDevices; MPN: 95566-61002; OC_FARNELL: unknown; OC_NEWARK: 22K8620
T1-T6 = HyTechDevices; _EXTERNAL_: 1

## Nets
5KW_TRIG: 5KW_TRIM.2 IC3.6
5KW_TRIG1: 5KW_TRIM1.2 IC6.6
12V_F1: BUS1.1 FUSE_BUS_1.L1 FUSE_BUS_1.L2
12V_F2: BUS2.1 FUSE_BUS_2.R1 FUSE_BUS_2.R2
12V_F3: BUS3.1 FUSE_BUS_3.L1 FUSE_BUS_3.L2
12V_F4: BUS4.1 FUSE_BUS_4.R1 FUSE_BUS_4.R2
12VSUPPLY_READ: R93.2 R94.1 U$22.A3
12VSUPPLY_READ1: R114.2 R115.1 U$24.A3
+5V: 5KW_TRIM.1 C3.1 CURRENT1.1 IC1.3 IC3.8 ON-LED.A R6.1 R7.1
+5V1: 5KW_TRIM1.1 C2.1 CURRENT2.1 IC4.3 IC6.8 ON-LED1.A R28.1 R32.1
+5V2: BSPD1:CALIBRATE3.1 BSPD1:MC34161DG.8 BSPD1:R1.1 BSPD1:R4.1 BSPD1:R5.P$2 BSPD1:R7.2 BSPD1:U$2.4 BSPD1:U$3.4 BSPD1:U$4.8 BSPD1:U$6.5 BSPD1:U$10.8 BSPD1:U$12.8 PEDALS.1 PEDALS.4 PEDALS.7 U$13.VIN U$14.3 U$15.3
+5V3: BSPD1:CALIBRATE6.1 BSPD1:MC34161DG1.8 BSPD1:R2.1 BSPD1:R9.P$2 BSPD1:R11.1 BSPD1:R12.2 BSPD1:U$5.8 BSPD1:U$7.8 BSPD1:U$8.4 BSPD1:U$9.4 BSPD1:U$11.8 BSPD1:U$14.5 PEDALS1.1 PEDALS1.4 PEDALS1.7 U$17.VIN U$18.3 U$19.3
+5V4: BOARD_TEMP.1 C6.2 CAN_TRANSCEIVER.3 R100.1 REG.3 U$22.VIN
+5V5: BOARD_TEMP1.1 C8.2 CAN_TRANSCEIVER1.3 R121.1 REG1.3 U$24.VIN
+5V6: U$25.VIN U$26.3 U$27.16 U$28.3 X9.8
+5V7: U$29.VIN U$30.3 U$31.16 U$32.3 X10.8
+12V: BMS.1 IC1.1 IC2.8 IMD.1 POWER.1
+12V1: BMS1.1 IC4.1 IC5.8 IMD1.1 POWER1.1
+12V2: BSPD1:D2.C BSPD1:U$1.2 BSPD.9 U$14.1 U$16.4 X1.1 X2.1
+12V3: BSPD1.9 BSPD1:D4.C BSPD1:U$13.2 U$18.1 U$20.4 X3.1 X4.1
+12V4: BMS_SSR.4 BRAKE_LIGHT_SSR.6 C5.2 FUSE_BUS_1.R1 FUSE_BUS_1.R2 FUSE_BUS_2.L1 FUSE_BUS_2.L2 IMD_SSR.4 INVERTER_SSR.4 POWER2.1 R93.1 REG.1 U$21.P
+12V5: BMS_SSR1.4 BRAKE_LIGHT_SSR1.6 C7.2 FUSE_BUS_3.R1 FUSE_BUS_3.R2 FUSE_BUS_4.L1 FUSE_BUS_4.L2 IMD_SSR1.4 INVERTER_SSR1.4 POWER3.1 R114.1 REG1.1 U$23.P
+12V6: IN.1 OUT.1 U$28.1
+12V7: IN1.1 OUT1.1 U$32.1
BMS_COIL_PWR: BMS_LATCH_SSR.3 D15.C IMD_SHUTDOWN1.4 IMD_SHUTDOWN1.COIL- R97.1
BMS_COIL_PWR1: BMS_LATCH_SSR1.3 D21.C IMD_SHUTDOWN3.4 IMD_SHUTDOWN3.COIL- R118.1
BMS_OK: BMS.7 IC2.5 MAIN.6
BMS_OK1: BMS1.7 IC5.5 MAIN1.6
BMS_OK2: D12.A R83.2 R98.1 X5.2
BMS_OK3: D18.A R104.2 R119.1 X7.2
BMS_OK_READ: R89.2 R90.1 U$22.A1
BMS_OK_READ1: R110.2 R111.1 U$24.A1
BMS_PWR_STEP: BMS_LATCH_SSR.4 BMS_SSR.3 IMD_SHUTDOWN1.3
BMS_PWR_STEP1: BMS_LATCH_SSR1.4 BMS_SSR1.3 IMD_SHUTDOWN3.3
BSPD1:N$1: BSPD1:D1.C BSPD1:U$2.3 BSPD1:U$3.3 BSPD1:U$3.COIL- BSPD1:U$12.5
BSPD1:N$2: BSPD1:R3.2 BSPD1:U$6.4
BSPD1:N$3: BSPD1:R6.2 BSPD1:U$2.1
BSPD1:N$4: BSPD1:CALIBRATE5.2 BSPD1:MC34161DG1.3
BSPD1:N$5: BSPD1:CALIBRATE2.2 BSPD1:MC34161DG.3
BSPD1:N$6: BSPD1:CALIBRATE1.2 BSPD1:MC34161DG.2
BSPD1:N$7: BSPD1:CALIBRATE3.2 BSPD1:U$4.2
BSPD1:N$8: BSPD1:CALIBRATE4.2 BSPD1:MC34161DG1.2
BSPD1:N$9: BSPD1:R6.1 BSPD1:U$4.1
BSPD1:N$10: BSPD1:MC34161DG.5 BSPD1:MC34161DG.6 BSPD1:R1.2 BSPD1:U$6.2 BSPD1:U$10.5
BSPD1:N$11: BSPD1:R10.1 BSPD1:U$11.1
BSPD1:N$12: BSPD1:C2.1 BSPD1:R8.1 BSPD1:R9.P$1 BSPD1:U$7.3 BSPD1:U$11.3
BSPD1:N$13: BSPD1:C1.1 BSPD1:R3.1 BSPD1:R5.P$1 BSPD1:U$4.3 BSPD1:U$12.3
BSPD1:N$14: BSPD1:CALIBRATE6.2 BSPD1:U$11.2
BSPD1:N$15: BSPD1:D3.C BSPD1:U$7.5 BSPD1:U$8.3 BSPD1:U$9.3 BSPD1:U$9.COIL-
BSPD1:N$16: BSPD1:MC34161DG1.5 BSPD1:MC34161DG1.6 BSPD1:R2.2 BSPD1:U$5.5 BSPD1:U$14.2
BSPD1:N$17: BSPD1:R8.2 BSPD1:U$14.4
BSPD1:N$18: BSPD1:R10.2 BSPD1:U$8.1
BSPD1:SHUTDOWN_C: BSPD1:U$1.S BSPD1:U$3.6
BSPD1:SHUTDOWN_C1: BSPD1:U$9.6 BSPD1:U$13.S
BSPD_CUR_FAULT: IC3.7 MAIN.5
BSPD_CUR_FAULT1: IC6.7 MAIN1.5
CANH: BUS1.4 BUS2.4 CAN_TRANSCEIVER.7 R87.1
CANH1: BUS3.4 BUS4.4 CAN_TRANSCEIVER1.7 R108.1
CANH2: IN.4 OUT.4 R123.2 U$26.7
CANH3: IN1.4 OUT1.4 R127.2 U$30.7
CANH_IN: BMS.6 POWER.4 R2.1
CANH_IN1: BMS1.6 POWER1.4 R35.1
CANH_OUT: BMS.4 MAIN.12 R1.1
CANH_OUT1: BMS1.4 MAIN1.12 R33.1
CANL: BUS1.3 BUS2.3 CAN_TRANSCEIVER.6 R87.2
CANL1: BUS3.3 BUS4.3 CAN_TRANSCEIVER1.6 R108.2
CANL2: IN.3 OUT.3 R123.1 U$26.6
CANL3: IN1.3 OUT1.3 R127.1 U$30.6
CANL_IN: BMS.5 POWER.3 R2.2
CANL_IN1: BMS1.5 POWER1.3 R35.2
CANL_OUT: BMS.3 MAIN.11 R1.2
CANL_OUT1: BMS1.3 MAIN1.11 R33.2
CUR_SENSE: CURRENT1.2 IC3.5 R6.2
CUR_SENSE1: CURRENT2.2 IC6.5 R32.2
DISCHARGE1: HV+UNFUSED.1 HV+UNFUSED.2 U$3.P$2 U$12.CONTACT1
DISCHARGE2: DISCH+.1 DISCH+.2 U$12.CONTACT2
DISCHARGE3: DISCH-.1 DISCH-.2 HV-UNFUSED.1 HV-UNFUSED.2 U$4.P$2
DISCHARGE4: DISCH+1.1 DISCH+1.2 U$6.CONTACT2
DISCHARGE5: HV+UNFUSED1.1 HV+UNFUSED1.2 U$6.CONTACT1 U$10.P$2
DISCHARGE6: DISCH-1.1 DISCH-1.2 HV-UNFUSED1.1 HV-UNFUSED1.2 U$11.P$2
FAN1-: T1.2 X9.1
FAN1-1: T4.2 X10.1
FAN2-: T2.2 X9.3
FAN2-1: T5.2 X10.3
FAN3-: T3.2 X9.6
FAN3-1: T6.2 X10.6
GND: 5KW_TRIM.3 BMS.2 C3.2 CURRENT1.4 D2.A IC1.2 IC2.4 IC3.4 IMD.2 IMD.3 IMD.4 POWER.2 R3.1 R4.2 R5.2 TRIM-.2 U$5.8SENSE- U$5.9VOUT- U$12.COIL-
GND1: 5KW_TRIM1.3 BMS1.2 C2.2 CURRENT2.4 D4.A IC4.2 IC5.4 IC6.4 IMD1.2 IMD1.3 IMD1.4 POWER1.2 R29.1 R30.2 R34.2 TRIM-1.2 U$6.COIL- U$7.8SENSE- U$7.9VOUT-
GND2: BSPD1:C1.2 BSPD1:CALIBRATE1.3 BSPD1:CALIBRATE2.3 BSPD1:CALIBRATE3.3 BSPD1:D1.A BSPD1:D2.A BSPD1:MC34161DG.4 BSPD1:MC34161DG.7 BSPD1:U$1.1 BSPD1:U$2.2 BSPD1:U$3.COIL+ BSPD1:U$4.4 BSPD1:U$6.3 BSPD1:U$10.4 BSPD1:U$12.4 BSPD.10 D7.A PEDALS.2 PEDALS.5 PEDALS.8 R54.1 R55.1 R56.1 R57.1 R58.1 R59.1 R61.1 R66.1 SOFTWARE_SHUTOFF.1 U$13.GND U$14.2 U$14.4 U$15.2 U$15.8 X1.2 X2.2
GND3: BSPD1.10 BSPD1:C2.2 BSPD1:CALIBRATE4.3 BSPD1:CALIBRATE5.3 BSPD1:CALIBRATE6.3 BSPD1:D3.A BSPD1:D4.A BSPD1:MC34161DG1.4 BSPD1:MC34161DG1.7 BSPD1:U$5.4 BSPD1:U$7.4 BSPD1:U$8.2 BSPD1:U$9.COIL+ BSPD1:U$11.4 BSPD1:U$13.1 BSPD1:U$14.3 D10.A PEDALS1.2 PEDALS1.5 PEDALS1.8 R68.1 R69.1 R70.1 R71.1 R72.1 R73.1 R75.1 R80.1 SOFTWARE_SHUTOFF1.1 U$17.GND U$18.2 U$18.4 U$19.2 U$19.8 X3.2 X4.2
GND4: BUS1.2 BUS2.2 C5.1 C6.1 CAN_TRANSCEIVER.2 CAN_TRANSCEIVER.8 D14.A D15.A D16.A IMD_SHUTDOWN1.COIL+ IMD_SHUTDOWN.COIL+ LED7.C LED8.C LED9.C LED10.C LED11.C LED12.C LED13.C LED14.C LED15.C POWER2.2 R88.2 R90.2 R92.2 R94.2 R95.1 R98.2 R99.2 REG.2 REG.4 U$21.2 U$22.AGND U$22.GND X6.2
GND5: BUS3.2 BUS4.2 C7.1 C8.1 CAN_TRANSCEIVER1.2 CAN_TRANSCEIVER1.8 D20.A D21.A D22.A IMD_SHUTDOWN2.COIL+ IMD_SHUTDOWN3.COIL+ LED16.C LED17.C LED18.C LED19.C LED20.C LED21.C LED22.C LED23.C LED24.C POWER3.2 R109.2 R111.2 R113.2 R115.2 R116.1 R119.2 R120.2 REG1.2 REG1.4 U$23.2 U$24.AGND U$24.GND X8.2
GND6: IN.2 OUT.2 U$25.GND U$26.2 U$26.8 U$27.8 U$28.2 U$28.4 X9.9
GND7: T1.3 X9.2
GND8: T2.3 X9.4
GND9: T3.3 X9.7
GND10: IN1.2 OUT1.2 U$29.GND U$30.2 U$30.8 U$31.8 U$32.2 U$32.4 X10.9
GND11: T4.3 X10.2
GND12: T5.3 X10.4
GND13: T6.3 X10.7
HV+FUSED: C1.P$1 FUSE.P1 FUSE.P2 HV+FUSED.1 HV+FUSED.2 IMD_HV+.1 IMD_HV+.2 U$3.P$1
HV+FUSED1: FUSE2.N3 FUSE2.N4 HV_REG3.1 HV_REG4.1 R41.2 U$7.1VIN+
HV+FUSED2: C4.P$1 FUSE2.P1 FUSE2.P2 HV+FUSED1.1 HV+FUSED1.2 IMD_HV+1.1 IMD_HV+1.2 U$10.P$1
HV+FUSED250: FUSE.N3 FUSE.N4 HV_REG1.1 HV_REG2.1 R14.2 U$5.1VIN+
HV-FUSED: C1.P$2 FUSE1.P1 FUSE1.P2 HV-FUSED.1 HV-FUSED.2 IMD_HV-.1 IMD_HV-.2 U$4.P$1
HV-FUSED1: C4.P$2 FUSE3.P1 FUSE3.P2 HV-FUSED1.1 HV-FUSED1.2 IMD_HV-1.1 IMD_HV-1.2 U$11.P$1
HV-FUSED2: FUSE3.N3 FUSE3.N4 INDICATOR1.2 R37.1 R49.2 R52.2 THRESHOLD1.3 U$7.4VIN-
HV-FUSED250: FUSE1.N3 FUSE1.N4 INDICATOR.2 R8.2 R19.1 R20.2 THRESHOLD.3 U$5.4VIN-
INVERTER_SUPPLY: U$21.S X5.5
INVERTER_SUPPLY1: U$23.S X7.5
N$1: AI_SSR.4 HV_REG2.2(TAB) R25.2
N$2: HV_REG1.2(TAB) R13.2 TSAL_SSR.1
N$3: ON-LED.C R5.1
N$4: TSAL_SSR.3 U$1.P$1
N$5: AI_SSR.2 R26.1
N$6: AI_SSR.1 TSAL_SSR.2
N$7: AI_SSR.3 INDICATOR.1
N$8: R8.1 R9.1
N$9: R26.2 THRESHOLD.2(TAB)
N$10: R14.1 R15.1
N$11: R15.2 R16.2
N$12: R17.1 R18.1
N$13: R18.2 R19.2
N$14: R9.2 R10.2
N$15: HV_REG2.3 R22.1 R23.1
N$16: R11.2 R12.2
N$17: R12.1 R13.1
N$18: HV_REG1.3 R10.1 R11.1
N$19: R23.2 R24.2
N$20: R24.1 R25.1
N$21: R21.2 R22.2
N$22: R16.1 R17.2 THRESHOLD.1
N$23: R20.1 R21.1
N$25: AI_SSR1.4 HV_REG3.2(TAB) R47.2
N$26: HV_REG3.3 R27.1 R31.1
N$27: IC5.1 IC5.2 IMD-OK1.A
N$28: BMS-OK1.A IC5.6 IC5.7
N$29: BMS-OK1.C R30.1
N$30: IMD-OK1.C R29.2
N$31: ON-LED1.C R34.1
N$32: HV_REG4.2(TAB) R39.2 TSAL_SSR1.1
N$33: R40.1 R41.1
N$34: R36.2 R40.2
N$35: R42.1 R43.1
N$36: R37.2 R42.2
N$37: TSAL_SSR1.3 U$8.P$1
N$38: AI_SSR1.2 R38.1
N$39: AI_SSR1.1 TSAL_SSR1.2
N$40: AI_SSR1.3 INDICATOR1.1
N$41: HV_REG4.3 R45.1 R50.1
N$42: IC2.1 IC2.2 IMD-OK.A
N$43: BMS-OK.A IC2.6 IC2.7
N$44: BMS-OK.C R4.1
N$45: IMD-OK.C R3.2
N$46: R50.2 R51.2
N$47: R51.1 R52.1
N$48: R36.1 R43.2 THRESHOLD1.1
N$49: R44.2 R45.2
N$50: R39.1 R44.1
N$51: R38.2 THRESHOLD1.2(TAB)
N$52: R27.2 R46.2
N$53: R46.1 R47.1
N$54: R31.2 R48.2
N$55: R48.1 R49.1
N$57: R53.2 U$15.6 X1.3 X2.3
N$58: R53.1 U$15.7 X1.4 X2.4
N$59: U$13.D4(CANRX) U$15.4
N$60: U$13.D3(CANTX) U$15.1
N$61: PEDALS.6 R63.1
N$62: R54.2 R62.2 U$13.A0
N$63: LED1.C R57.2
N$64: LED2.C R58.2
N$65: LED3.C R59.2
N$66: R61.2 U$16.2
N$67: R55.2 R63.2 U$13.A1
N$68: PEDALS.9 R62.1
N$69: R56.2 R64.2 U$13.A2
N$70: D5.A PEDALS.3 R60.P$2
N$71: D5.C R64.1
N$72: D7.C SOFTWARE_SHUTOFF.2 U$16.3
N$73: D6.C R65.2
N$74: R67.2 U$19.6 X3.3 X4.3
N$75: R67.1 U$19.7 X3.4 X4.4
N$76: U$17.D4(CANRX) U$19.4
N$77: U$17.D3(CANTX) U$19.1
N$78: PEDALS1.6 R77.1
N$79: R68.2 R76.2 U$17.A0
N$80: LED4.C R71.2
N$81: LED5.C R72.2
N$82: LED6.C R73.2
N$83: R75.2 U$20.2
N$84: R69.2 R77.2 U$17.A1
N$85: PEDALS1.9 R76.1
N$86: R70.2 R78.2 U$17.A2
N$87: D8.A PEDALS1.3 R74.P$2
N$88: D8.C R78.1
N$89: D10.C SOFTWARE_SHUTOFF1.2 U$20.3
N$90: D9.C R79.2
N$91: CAN_TRANSCEIVER.4 U$22.D4(CANRX)
N$92: CAN_TRANSCEIVER.1 U$22.D3(CANTX)
N$93: D16.C IMD_LATCH_SSR.3 IMD_SHUTDOWN.4 IMD_SHUTDOWN.COIL- R86.1
N$94: R82.2 U$22.D12
N$95: BRAKE_LIGHT_SSR.5 X5.4
N$96: BOARD_TEMP.2 R95.2 U$22.A5
N$97: R85.1 U$22.D11
N$98: IMD_LATCH_SSR.2 LED7.A
N$99: BMS_SSR.2 LED9.A
N$100: BMS_SSR.1 R83.1
N$101: BRAKE_LIGHT_SSR.2 LED10.A
N$102: BRAKE_LIGHT_SSR.1 R82.1
N$103: LED11.A R86.2
N$104: INVERTER_SSR.1 U$22.D6
N$105: U$22.A4 X5.6
N$106: D11.C R81.1
N$107: D12.C R89.1
N$108: D13.C R91.1
N$109: D14.C INVERTER_SSR.3 U$21.1
N$110: INVERTER_SSR.2 R96.1
N$111: LED12.A R96.2
N$112: IMD_LATCH_SSR.1 R84.1
N$113: R84.2 U$22.D10(TX2)
N$114: BMS_LATCH_SSR.2 LED8.A
N$115: BMS_LATCH_SSR.1 R85.2
N$116: LED13.A R97.2
N$117: LED14.A R100.2
N$118: IMD_LATCH_SSR.4 IMD_SHUTDOWN.3 IMD_SSR.3
N$119: IMD_SSR.2 LED15.A
N$120: IMD_SSR.1 R101.2
N$121: CAN_TRANSCEIVER1.4 U$24.D4(CANRX)
N$122: CAN_TRANSCEIVER1.1 U$24.D3(CANTX)
N$123: D22.C IMD_LATCH_SSR1.3 IMD_SHUTDOWN2.4 IMD_SHUTDOWN2.COIL- R107.1
N$124: R103.2 U$24.D12
N$125: BRAKE_LIGHT_SSR1.5 X7.4
N$126: BOARD_TEMP1.2 R116.2 U$24.A5
N$127: R106.1 U$24.D11
N$128: IMD_LATCH_SSR1.2 LED16.A
N$129: BMS_SSR1.2 LED18.A
N$130: BMS_SSR1.1 R104.1
N$131: BRAKE_LIGHT_SSR1.2 LED19.A
N$132: BRAKE_LIGHT_SSR1.1 R103.1
N$133: LED20.A R107.2
N$134: INVERTER_SSR1.1 U$24.D6
N$135: U$24.A4 X7.6
N$136: D17.C R102.1
N$137: D18.C R110.1
N$138: D19.C R112.1
N$139: D20.C INVERTER_SSR1.3 U$23.1
N$140: INVERTER_SSR1.2 R117.1
N$141: LED21.A R117.2
N$142: IMD_LATCH_SSR1.1 R105.1
N$143: R105.2 U$24.D10(TX2)
N$144: BMS_LATCH_SSR1.2 LED17.A
N$145: BMS_LATCH_SSR1.1 R106.2
N$146: LED22.A R118.2
N$147: LED23.A R121.2
N$148: IMD_LATCH_SSR1.4 IMD_SHUTDOWN2.3 IMD_SSR1.3
N$149: IMD_SSR1.2 LED24.A
N$150: IMD_SSR1.1 R122.2
N$151: U$25.D3(CANTX) U$26.1
N$152: U$25.D4(CANRX) U$26.4
N$153: R124.P$2 T1.1
N$154: R125.P$2 T2.1
N$155: R126.P$2 T3.1
N$156: R124.P$1 U$25.A9
N$157: R125.P$1 U$25.A8
N$158: R126.P$1 U$25.A7
N$159: U$25.D5 U$27.9
N$160: U$25.D6 U$27.7
N$161: U$25.D7(RX3) U$27.6
N$162: U$25.D8(TX3) U$27.5
N$163: U$25.D9(RX2) U$27.3
N$164: U$25.D10(TX2) U$27.2
N$165: U$25.D11 U$27.4
N$166: U$25.D12 U$27.13
N$167: U$25.A0 U$27.11
N$168: U$25.D13 U$27.12
N$169: U$29.D3(CANTX) U$30.1
N$170: U$29.D4(CANRX) U$30.4
N$171: R128.P$2 T4.1
N$172: R129.P$2 T5.1
N$173: R130.P$2 T6.1
N$174: R128.P$1 U$29.A9
N$175: R129.P$1 U$29.A8
N$176: R130.P$1 U$29.A7
N$177: U$29.D5 U$31.9
N$178: U$29.D6 U$31.7
N$179: U$29.D7(RX3) U$31.6
N$180: U$29.D8(TX3) U$31.5
N$181: U$29.D9(RX2) U$31.3
N$182: U$29.D10(TX2) U$31.2
N$183: U$29.D11 U$31.4
N$184: U$29.D12 U$31.13
N$185: U$29.A0 U$31.11
N$186: U$29.D13 U$31.12
OKHS: IC2.3 IMD.5 MAIN.7
OKHS1: IC5.3 IMD1.5 MAIN1.7
OKHS2: D11.A R99.1 R101.1 X5.1
OKHS3: D17.A R120.1 R122.1 X7.1
OKHS_READ: R81.2 R88.1 U$22.A0
OKHS_READ1: R102.2 R109.1 U$24.A0
PULSE: U$25.A1 U$27.10 X9.10
PULSE1: U$29.A1 U$31.10 X10.10
READ_CHARGE: BSPD1:U$12.1 BSPD1:U$12.2 BSPD.6 LED2.A U$13.A8
READ_CHARGE1: BSPD1.6 BSPD1:U$7.1 BSPD1:U$7.2 LED5.A U$17.A8
READ_FAULT: BSPD1:U$12.6 BSPD1:U$12.7 BSPD.5 LED3.A U$13.A7
READ_FAULT1: BSPD1.5 BSPD1:U$7.6 BSPD1:U$7.7 LED6.A U$17.A7
READ_SWITCH: BSPD1:U$10.6 BSPD1:U$10.7 BSPD.7 LED1.A U$13.A9
READ_SWITCH1: BSPD1.7 BSPD1:U$5.6 BSPD1:U$5.7 LED4.A U$17.A9
READ_UPSTREAM_SHUTDOWN: R65.1 R66.2 U$13.A3
READ_UPSTREAM_SHUTDOWN1: R79.1 R80.2 U$17.A3
SHUTDOWN1: D3.A D4.C INTERLOCK1.2 RELAYS1.1 RELAYS1.2 U$6.COIL+ U$9.P$2
SHUTDOWN2: INTERLOCK1.1 MAIN1.1
SHUTDOWN6: INTERLOCK.1 MAIN.1
SHUTDOWN7: D1.A D2.C INTERLOCK.2 RELAYS.1 RELAYS.2 U$2.P$2 U$12.COIL+
SHUTDOWN7_EXT_OUT: D1.C MAIN.2
SHUTDOWN7_EXT_OUT1: D3.C MAIN1.2
SHUTDOWN_A: BSPD.1 D6.A SOFTWARE_SHUTOFF.P
SHUTDOWN_A1: BSPD1.1 D9.A SOFTWARE_SHUTOFF1.P
SHUTDOWN_A2: IMD_SHUTDOWN1.6 IMD_SHUTDOWN.5
SHUTDOWN_A3: IMD_SHUTDOWN2.5 IMD_SHUTDOWN3.6
SHUTDOWN_B: BSPD1:U$1.P SOFTWARE_SHUTOFF.S
SHUTDOWN_B1: BSPD1:U$13.P SOFTWARE_SHUTOFF1.S
SHUTDOWN_B2: D13.A IMD_SHUTDOWN1.5 X5.3
SHUTDOWN_B3: D19.A IMD_SHUTDOWN3.5 X7.3
SHUTDOWN_D: BSPD1:U$3.7 BSPD.2
SHUTDOWN_D1: BSPD1.2 BSPD1:U$9.7
SHUTDOWN_OUT_READ: R91.2 R92.1 U$22.A2
SHUTDOWN_OUT_READ1: R112.2 R113.1 U$24.A2
SHUTDOWN_POWER: IMD_SHUTDOWN.6 X6.1
SHUTDOWN_POWER1: IMD_SHUTDOWN2.6 X8.1
SHUTDOWN_RELAY_CTRL: U$13.D12 U$16.1
SHUTDOWN_RELAY_CTRL1: U$17.D12 U$20.1
SIGNAL_BRAKE: BSPD1:CALIBRATE2.1 BSPD1:R4.2 BSPD.4 R60.P$1
SIGNAL_BRAKE1: BSPD1.4 BSPD1:CALIBRATE5.1 BSPD1:R11.2 R74.P$1
SIGNAL_CURRENT: BSPD1:CALIBRATE1.1 BSPD1:R7.1 BSPD.3
SIGNAL_CURRENT1: BSPD1.3 BSPD1:CALIBRATE4.1 BSPD1:R12.1
TEMP_SENSE: BMS.8 CURRENT1.3 R7.2
TEMP_SENSE1: BMS1.8 CURRENT2.3 R28.2
TRIM: TRIM+.1 TRIM-.1 U$5.7TRIM
TRIM1: TRIM+1.1 TRIM-1.1 U$7.7TRIM
TSAL+: MAIN.3 U$1.P$2 U$2.P$1
TSAL+1: MAIN1.3 U$8.P$2 U$9.P$1
TSVP+: MAIN.4 TRIM+.2 TSAL_SSR.4 U$5.5VOUT+ U$5.6SENSE+
TSVP+1: MAIN1.4 TRIM+1.2 TSAL_SSR1.4 U$7.5VOUT+ U$7.6SENSE+

## Tracks (layer width: path | path; a pad name or v marks a point on that pad's centre or on a via)
5KW_TRIG  (via drill 0.6)
  Top 0.406: v32.51,36.07 34.54,36.07 36.32,34.29 36.32,32.26 33.02,28.96 33.02,26.92 29.72,23.62 v29.72,22.1
  Bottom 0.406: IC3.6 33.78,40.01 33.78,37.34 32.51,37.34 v32.51,36.07 | 5KW_TRIM.2 30.61,21.21 v29.72,22.1
5KW_TRIG1  (via drill 0.6)
  Top 0.406: v32.9,104.24 34.93,104.24 36.71,102.46 36.71,100.43 33.41,97.13 33.41,95.09 30.11,91.79 v30.11,90.27
  Bottom 0.406: IC6.6 34.17,108.17 34.17,105.51 32.9,105.51 v32.9,104.24 | 5KW_TRIM1.2 31,89.38 v30.11,90.27
12V_F1
  Bottom 1.778: FUSE_BUS_1.L2 9.84,190.31 | 9.84,190.31 FUSE_BUS_1.L1 | BUS1.1 52.84,208.66 55.31,211.14 55.31,216.72 17.46,216.72 17.46,210.12 9.84,202.5 9.84,190.31
12V_F2
  Bottom 1.778: BUS2.1 41.91,210.88 28.13,210.88 28.13,190.05 FUSE_BUS_2.R2 FUSE_BUS_2.R1
12V_F3
  Bottom 1.778: FUSE_BUS_3.L2 73.84,190.31 | 73.84,190.31 FUSE_BUS_3.L1 | BUS3.1 116.84,208.66 119.31,211.14 119.31,216.72 81.46,216.72 81.46,210.12 73.84,202.5 73.84,190.31
12V_F4
  Bottom 1.778: BUS4.1 105.91,210.88 92.13,210.88 92.13,190.05 FUSE_BUS_4.R2 FUSE_BUS_4.R1
12VSUPPLY_READ
  Bottom 0.406: 30.42,162.89 30.42,163.89 32.45,165.92 32.45,166.42 R93.2
  Bottom 0.61: U$22.A3 31.95,169.99 31.95,168.45 32.45,167.96 32.45,166.44 R93.2 | 30.42,162.89 R94.1
12VSUPPLY_READ1
  Bottom 0.406: 94.42,162.89 94.42,163.89 96.45,165.92 96.45,166.42 R114.2
  Bottom 0.61: U$24.A3 95.95,168.45 96.45,167.96 96.45,166.44 R114.2 | 94.42,162.89 R115.1
+5V  (via drill 0.6)
  Top 0.61: 19.46,27.69 ON-LED.A 19.43,25.65 v21.08,25.65 21.08,30.99 19.81,32.26 19.81,36.32 v25.15,36.32 26.42,36.32 27.69,37.59 v27.69,42.55
  Bottom 0.61: 5KW_TRIM.1 30.86,18.67 28.96,20.57 | 28.96,20.57 25.53,24 IC1.3 v21.08,25.65 | C3.1 28.96,18.67 28.96,20.57 | R7.1 31.82,43.31 IC3.8 v27.69,42.55 | 25.47,36.32 v25.15,36.32 | 25.47,36.32 CURRENT1.1 | R6.1 25.47,36.31 25.47,36.32
+5V1  (via drill 0.6)
  Top 0.61: 19.86,95.86 ON-LED1.A 19.82,93.82 v21.47,93.82 21.47,99.16 20.2,100.43 20.2,104.49 v25.54,104.49 26.81,104.49 28.08,105.76 v28.08,110.72
  Bottom 0.61: 5KW_TRIM1.1 31.25,86.84 29.35,88.74 | 29.35,88.74 25.92,92.17 IC4.3 v21.47,93.82 | C2.1 29.35,86.84 29.35,88.74 | R28.1 32.21,111.48 IC6.8 v28.08,110.72 | 25.86,104.49 v25.54,104.49 | 25.86,104.49 CURRENT2.1 | R32.1 25.86,104.48 25.86,104.49
+5V2  (via drill 0.6)
  Top 0.406: v223.81,42.48 223.81,43.24 228.38,47.81 | 238.92,35.11 238.92,30.79 245.27,30.79 | v245.27,33.84 245.27,30.79 | 245.27,30.79 259.75,30.79 v260,31.05 260.65,31.69 BSPD1:R1.1 264.94,32.32 269.19,32.32 BSPD1:U$2.4 | v252.38,44.26 252.38,45.53 v246.54,51.37 | v253.65,19.87 253.65,25.46 v252.13,25.46
  Top 0.61: v238.03,69.91 238.03,71.43 222.92,71.43 v222.92,61.53 228.38,61.53 228.38,56.07 | 228.38,47.81 228.38,56.07 | v234.09,12.51 234.09,16.82 229.27,16.82 229.27,32.32 232.06,35.11 238.92,35.11 v238.92,49.34 237.4,50.86 233.59,50.86 228.38,56.07
  Bottom 0.406: U$15.3 225.33,42.48 v223.81,42.48 | 252.38,30.03 252.38,32.89 BSPD1:MC34161DG.8 | 252.38,30.03 258.99,30.03 v260,31.05 | v245.27,33.84 244.31,32.89 BSPD1:U$10.8 | 244.89,49.84 BSPD1:U$12.8 | 244.89,49.84 246.54,49.84 | 246.54,49.84 246.54,42.54 BSPD1:U$4.8 | 252.38,30.03 253.65,28.76 BSPD1:R5.P$2 253.65,25.46 v252.13,25.46 | BSPD1:R4.1 v252.38,44.26 252.38,46.29 BSPD1:R7.2 | v246.54,51.37 246.54,49.84 | 244.89,49.84 239.43,49.84 v238.92,49.34 | BSPD1:U$6.5 256.38,19.87 v253.65,19.87
  Bottom 0.61: PEDALS.1 218.72,8.52 PEDALS.7 218.72,4.89 235.36,4.89 235.36,12.51 | PEDALS.4 227.12,13.4 228.51,14.79 235.36,14.79 235.36,12.51 | U$14.3 225.44,61.53 v222.92,61.53 | U$13.VIN v238.03,69.91 238.03,64.58 247.81,64.58 | 235.36,12.51 v234.09,12.51 | 247.81,64.58 250.35,64.58 BSPD1:U$3.4 | 247.81,64.58 247.81,68.64 BSPD1:CALIBRATE3.1
+5V3  (via drill 0.6)
  Top 0.406: v223.81,118.48 223.81,119.24 228.38,123.81 | 238.92,111.11 238.92,106.79 245.27,106.79 | v245.27,109.84 245.27,106.79 | 245.27,106.79 259.75,106.79 v260,107.05 260.65,107.69 BSPD1:R2.1 264.94,108.32 269.19,108.32 BSPD1:U$8.4 | v252.38,120.26 252.38,121.53 v246.54,127.37 | v253.65,95.87 253.65,101.46 v252.13,101.46
  Top 0.61: v238.03,145.91 238.03,147.43 222.92,147.43 v222.92,137.53 228.38,137.53 228.38,132.07 | 228.38,123.81 228.38,132.07 | v234.09,88.51 234.09,92.82 229.27,92.82 229.27,108.32 232.06,111.11 238.92,111.11 v238.92,125.34 237.4,126.86 233.59,126.86 228.38,132.07
  Bottom 0.406: U$19.3 225.33,118.48 v223.81,118.48 | 252.38,106.03 252.38,108.89 BSPD1:MC34161DG1.8 | 252.38,106.03 258.99,106.03 v260,107.05 | v245.27,109.84 244.31,108.89 BSPD1:U$5.8 | 244.89,125.84 BSPD1:U$7.8 | 244.89,125.84 246.54,125.84 | 246.54,125.84 246.54,118.54 BSPD1:U$11.8 | 252.38,106.03 253.65,104.76 BSPD1:R9.P$2 253.65,101.46 v252.13,101.46 | BSPD1:R11.1 v252.38,120.26 252.38,122.29 BSPD1:R12.2 | v246.54,127.37 246.54,125.84 | 244.89,125.84 239.43,125.84 v238.92,125.34 | BSPD1:U$14.5 256.38,95.87 v253.65,95.87
  Bottom 0.61: PEDALS1.1 218.72,84.52 PEDALS1.7 218.72,80.89 235.36,80.89 235.36,88.51 | PEDALS1.4 227.12,89.4 228.51,90.79 235.36,90.79 235.36,88.51 | U$18.3 225.44,137.53 v222.92,137.53 | U$17.VIN v238.03,145.91 238.03,140.58 247.81,140.58 | 235.36,88.51 v234.09,88.51 | 247.81,140.58 250.35,140.58 BSPD1:U$9.4 | 247.81,140.58 247.81,144.64 BSPD1:CALIBRATE6.1
+5V4  (via drill 0.8)
  Top 0.406: R100.1 5.78,196.54 5.78,173.93
  Top 0.61: v22.29,167.32 v14.03,167.32 | v9.08,173.93 5.78,173.93 5.52,173.93 5.52,148.78 13.78,140.52 28.26,140.52 v28.51,140.78 | REG.3 54.52,149.55 54.52,151.32 v55.69,151.32 57.34,151.32 C6.2
  Bottom 0.406: CAN_TRANSCEIVER.3 18.1,162.37 16.45,162.37 13.4,165.42
  Bottom 0.61: v14.03,167.32 14.03,165.42 13.4,165.42 10.22,165.42 10.22,169.99 U$22.VIN v9.08,173.93 | v55.69,151.32 55.69,144.72 51.5,140.52 28.77,140.52 v28.51,140.78 | v22.29,167.32 23.42,167.32 BOARD_TEMP.1
+5V5  (via drill 0.8)
  Top 0.406: R121.1 69.78,196.54 69.78,173.93
  Top 0.61: v86.29,167.32 v78.03,167.32 | v73.08,173.93 69.78,173.93 69.52,173.93 69.52,148.78 77.78,140.52 92.26,140.52 v92.51,140.78 | REG1.3 118.52,149.55 118.52,151.32 v119.69,151.32 121.34,151.32 C8.2
  Bottom 0.406: CAN_TRANSCEIVER1.3 82.1,162.37 80.45,162.37 77.4,165.42
  Bottom 0.61: v78.03,167.32 78.03,165.42 77.4,165.42 74.22,165.42 74.22,169.99 U$24.VIN v73.08,173.93 | v119.69,151.32 119.69,144.72 115.5,140.52 92.77,140.52 v92.51,140.78 | v86.29,167.32 87.42,167.32 BOARD_TEMP1.1
+5V6  (via drill 0.6)
  Top 0.61: v167.19,141.16 167.19,147.13 169.99,149.92 169.99,156.15 | 169.99,156.15 165.04,156.15 165.04,177.99 v164.91,177.99 | v197.29,162.37 197.29,160.08 192.21,160.08 192.21,151.19 182.05,151.19 177.1,156.15 169.99,156.15
  Bottom 0.61: 158.94,177.35 159.57,177.99 U$25.VIN v164.91,177.99 | 158.94,177.35 158.94,165.92 U$26.3 | U$27.16 157.42,142.94 159.19,141.16 v167.19,141.16 | U$28.3 157.02,177.35 158.94,177.35 | v197.29,162.37 X9.8
+5V7  (via drill 0.6)
  Top 0.61: v242.19,156.16 242.19,162.13 244.99,164.92 244.99,171.15 | 244.99,171.15 240.04,171.15 240.04,192.99 v239.91,192.99 | v272.29,177.37 272.29,175.08 267.21,175.08 267.21,166.19 257.05,166.19 252.1,171.15 244.99,171.15
  Bottom 0.61: 233.94,192.35 234.57,192.99 U$29.VIN v239.91,192.99 | 233.94,192.35 233.94,180.92 U$30.3 | U$31.16 232.42,157.94 234.19,156.16 v242.19,156.16 | U$32.3 232.02,192.35 233.94,192.35 | v272.29,177.37 X10.8
+12V
  Bottom 0.61: 21.33,12.96 IMD.1 21.33,16.9 19.3,18.92 | 19.3,18.92 IC1.1 | 19.3,18.92 15.62,18.92 15.49,18.8 14.53,19.76 BMS.1 12.19,22 12.19,31.31 POWER.1 16.65,33.53 IC2.8
+12V1
  Bottom 0.61: 21.72,81.13 IMD1.1 21.72,85.07 19.69,87.09 | 19.69,87.09 IC4.1 | 19.69,87.09 16.01,87.09 15.88,86.97 14.92,87.93 BMS1.1 12.58,90.17 12.58,99.48 POWER1.1 17.04,101.7 IC5.8
+12V2  (via drill 0.6)
  Top 0.406: v268.64,58.23 268.64,53.15 273.21,53.15 273.21,59.24 266.1,66.35 260.26,66.35 260.26,71.43 v240.7,71.43
  Top 0.61: v217.08,65.59 v217.08,61.66
  Bottom 0.406: BSPD.9 270.88,53.15 268.64,53.15 v268.64,58.23 | v240.7,71.43 232.32,71.43 | BSPD1:D2.C 256.7,7.43 248.19,7.43 BSPD1:U$1.2
  Bottom 0.61: U$16.4 216.57,32.91 216.57,38.16 | v217.08,65.59 217.08,71.43 232.32,71.43 232.32,63.19 U$14.1 | v217.08,61.66 217.08,54.23 | BSPD1:U$1.2 248.06,6.77 248.06,4.89 237.65,4.89 237.65,16.82 225.46,16.82 225.46,22.92 214.54,22.92 214.54,28 225.71,28 225.71,38.16 216.57,38.16 | 216.57,38.16 216.57,41.53 216.69,41.53
  Bottom 1.778: X1.1 217.08,54.23 217.08,41.53 216.69,41.53 X2.1
+12V3  (via drill 0.6)
  Top 0.406: v268.64,134.23 268.64,129.15 273.21,129.15 273.21,135.24 266.1,142.35 260.26,142.35 260.26,147.43 v240.7,147.43
  Top 0.61: v217.08,141.59 v217.08,137.66
  Bottom 0.406: BSPD1.9 270.88,129.15 268.64,129.15 v268.64,134.23 | v240.7,147.43 232.32,147.43 | BSPD1:D4.C 256.7,83.43 248.19,83.43 BSPD1:U$13.2
  Bottom 0.61: U$20.4 216.57,108.91 216.57,114.16 | v217.08,141.59 217.08,147.43 232.32,147.43 232.32,139.19 U$18.1 | v217.08,137.66 217.08,130.23 | BSPD1:U$13.2 248.06,82.77 248.06,80.89 237.65,80.89 237.65,92.82 225.46,92.82 225.46,98.92 214.54,98.92 214.54,104 225.71,104 225.71,114.16 216.57,114.16 | 216.57,114.16 216.57,117.53 216.69,117.53
  Bottom 1.778: X3.1 217.08,130.23 217.08,117.53 216.69,117.53 X4.1
+12V4  (via drill 0.6, 0.8)
  Top 0.406: IMD_SSR.4 19.88,161.35 21.14,160.08 21.14,158.18 21.4,158.18 v22.16,157.41
  Top 0.61: v33.97,142.05 33.97,140.52 51.5,140.52 51.5,141.93 | 51.5,141.93 REG.1 54.15,144.59 55.56,144.59 59.12,148.14 v59.12,154.75 | v19.24,202.25 24.83,207.83 25.84,207.83 28.64,205.04 46.16,205.04 46.16,210.12 54.55,210.12 55.31,209.36 61.15,209.36 v61.15,211.39 | C5.2 51.5,142.3 51.5,141.93
  Bottom 0.406: 28.13,174.05 28.13,165.67 29.4,165.67 | v22.16,157.41 23.05,156.53 23.05,153.48 24.7,151.83 29.23,151.83 BMS_SSR.4
  Bottom 0.61: INVERTER_SSR.4 v61.15,211.39 | BRAKE_LIGHT_SSR.6 37.02,148.91 34.99,146.87 34.99,143.06 v33.97,142.05 30.16,142.05 29.4,142.81 29.4,147.38 30.67,148.65 BMS_SSR.4 | POWER2.1 50.78,167.96 61.91,167.96 61.91,154.75 v59.12,154.75 | v19.24,202.25 19.24,198.36 U$21.P | R93.1 30.16,166.43 29.4,165.67
  Bottom 1.778: FUSE_BUS_1.R2 FUSE_BUS_1.R1 17.46,180.4 | 17.46,180.4 22.19,180.4 FUSE_BUS_2.L1 FUSE_BUS_2.L2 25.59,174.05 28.13,174.05 50.78,174.05 POWER2.1 | U$21.P 18.99,195.9 17.72,194.63 17.72,180.66 17.46,180.4
+12V5  (via drill 0.6, 0.8)
  Top 0.406: IMD_SSR1.4 83.88,161.35 85.14,160.08 85.14,158.18 85.4,158.18 v86.16,157.41
  Top 0.61: v97.97,142.05 97.97,140.52 115.5,140.52 115.5,141.93 | 115.5,141.93 REG1.1 118.15,144.59 119.56,144.59 123.12,148.14 v123.12,154.75 | v83.24,202.25 88.83,207.83 89.84,207.83 92.64,205.04 110.16,205.04 110.16,210.12 118.55,210.12 119.31,209.36 125.15,209.36 v125.15,211.39 | C7.2 115.5,142.3 115.5,141.93
  Bottom 0.406: 92.13,174.05 92.13,165.67 93.4,165.67 | v86.16,157.41 87.05,156.53 87.05,153.48 88.7,151.83 93.22,151.83 BMS_SSR1.4
  Bottom 0.61: INVERTER_SSR1.4 v125.15,211.39 | BRAKE_LIGHT_SSR1.6 101.02,148.91 98.99,146.87 98.99,143.06 v97.97,142.05 94.16,142.05 93.4,142.81 93.4,147.38 94.67,148.65 BMS_SSR1.4 | POWER3.1 114.78,167.96 125.91,167.96 125.91,154.75 v123.12,154.75 | v83.24,202.25 83.24,198.36 U$23.P | R114.1 94.16,166.43 93.4,165.67
  Bottom 1.778: FUSE_BUS_3.R2 FUSE_BUS_3.R1 81.46,180.4 | 81.46,180.4 86.19,180.4 FUSE_BUS_4.L1 FUSE_BUS_4.L2 89.59,174.05 92.13,174.05 114.78,174.05 POWER3.1 | U$23.P 82.99,195.9 81.72,194.63 81.72,180.66 81.46,180.4
+12V6  (via drill 0.8)
  Top 1.778: v143.95,172.78 v143.95,157.54
  Bottom 0.61: U$28.1 151.81,181.42 141.12,181.42 IN.1
  Bottom 1.778: IN.1 143.95,172.98 v143.95,172.78 | v143.95,157.54 143.95,157.36 OUT.1
+12V7  (via drill 0.8)
  Top 1.778: v218.95,187.78 v218.95,172.54
  Bottom 0.61: U$32.1 226.81,196.42 216.12,196.42 IN1.1
  Bottom 1.778: IN1.1 218.95,187.98 v218.95,187.78 | v218.95,172.54 218.95,172.36 OUT1.1
BMS_COIL_PWR  (via drill 0.8)
  Top 0.406: v21.53,176.34 v29.4,176.34 29.27,176.34 R97.1